# EAGLE board Qwiic_KX13X-Panel (EAGLE 9.6.2), part 1 of 5
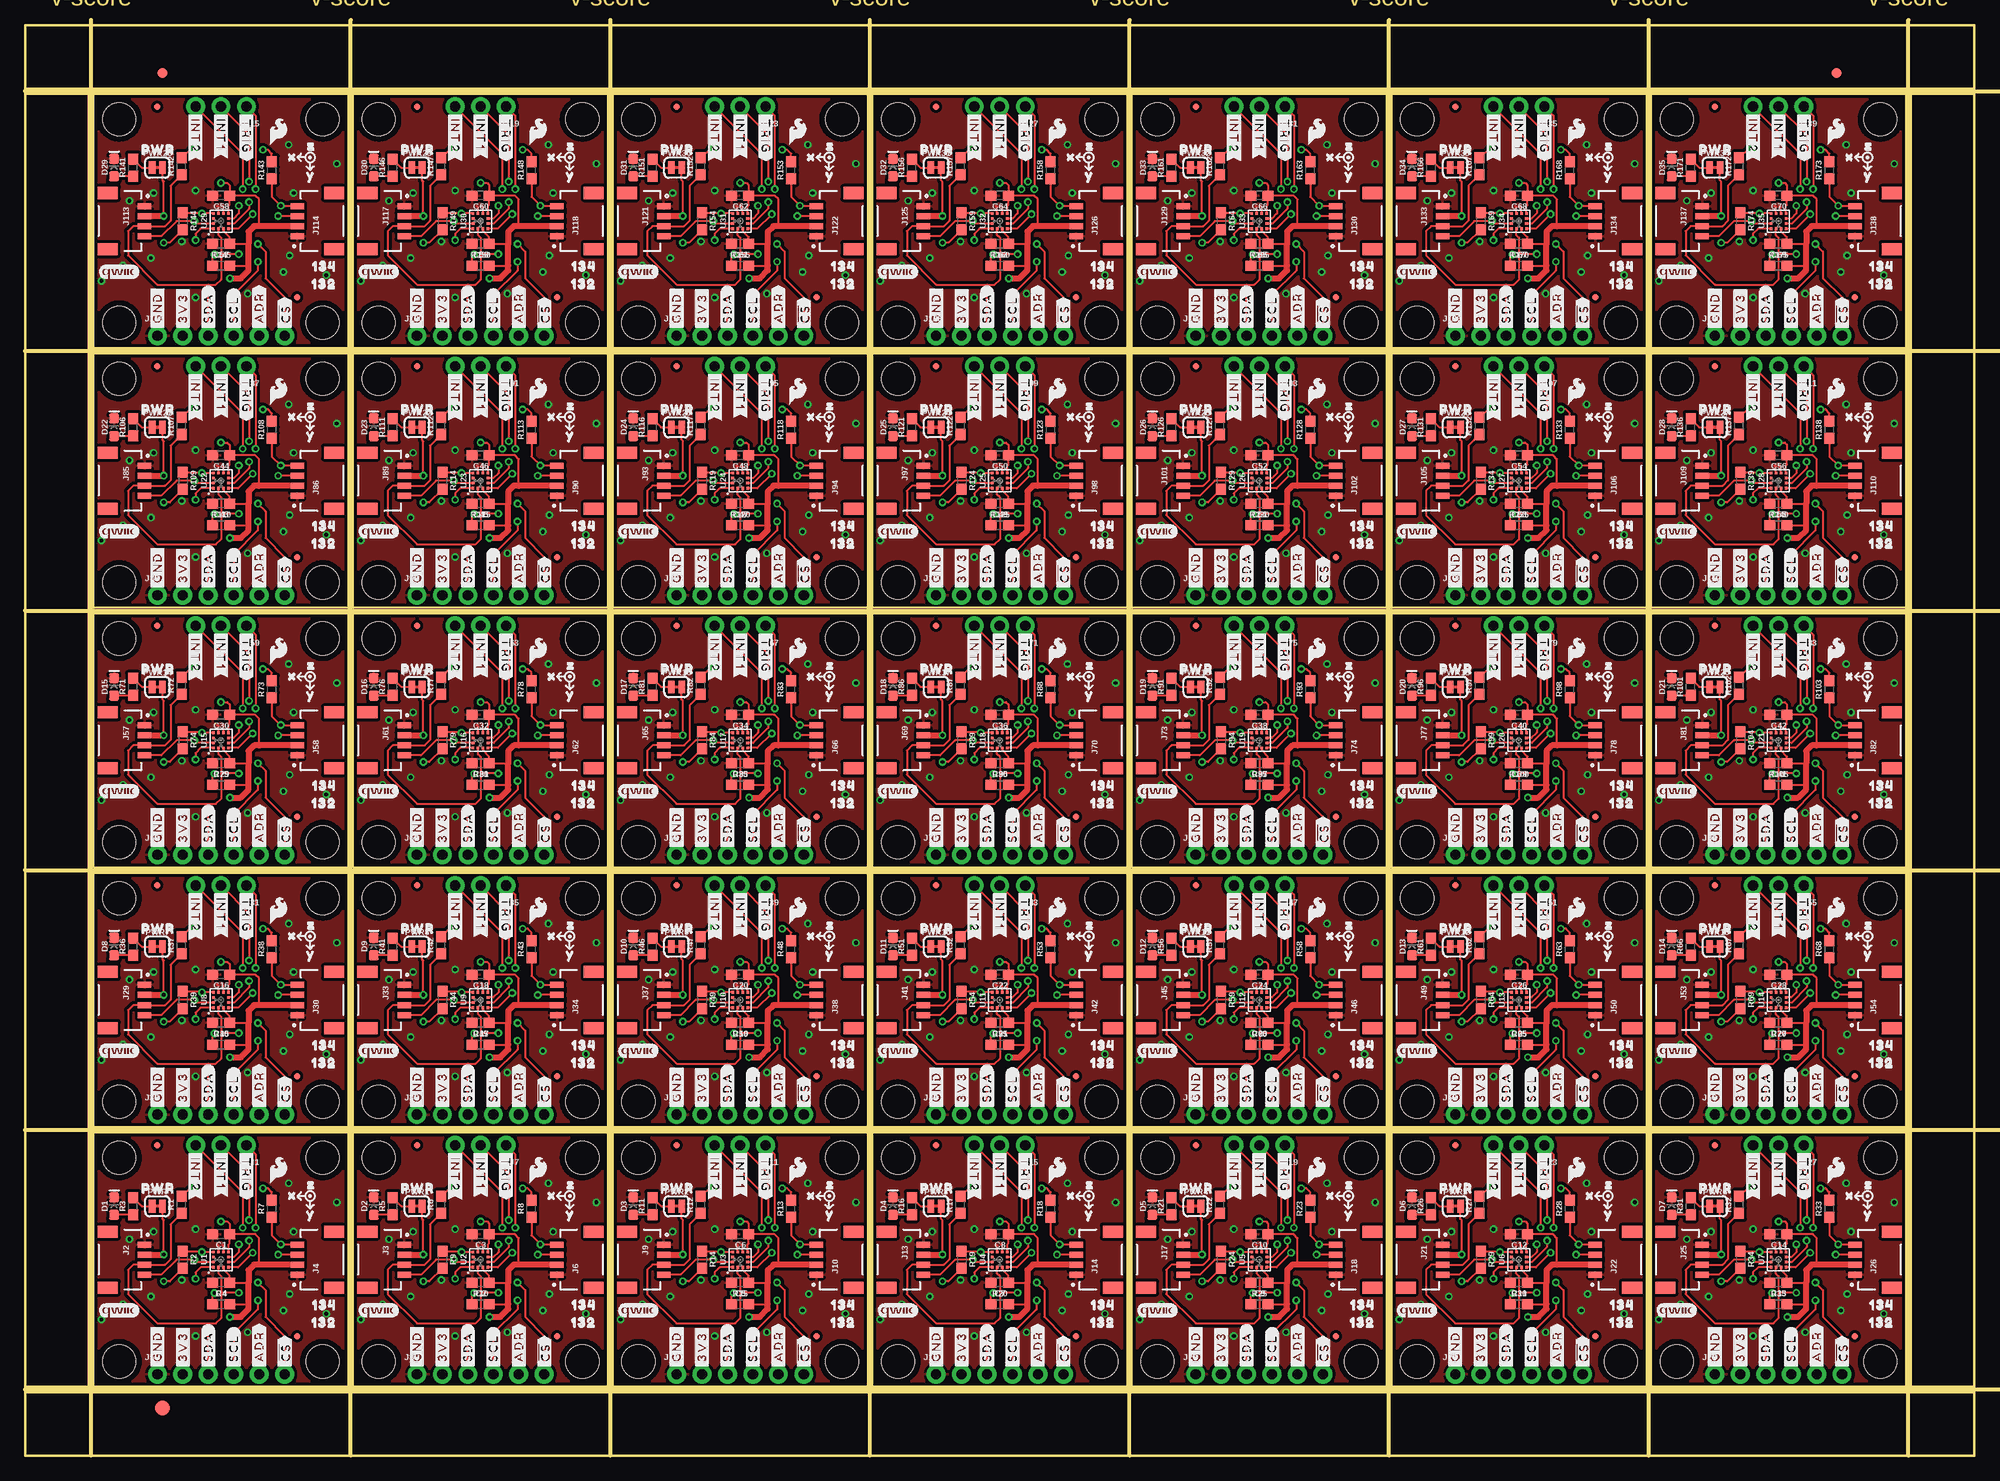
[diagram p0: board, top side]
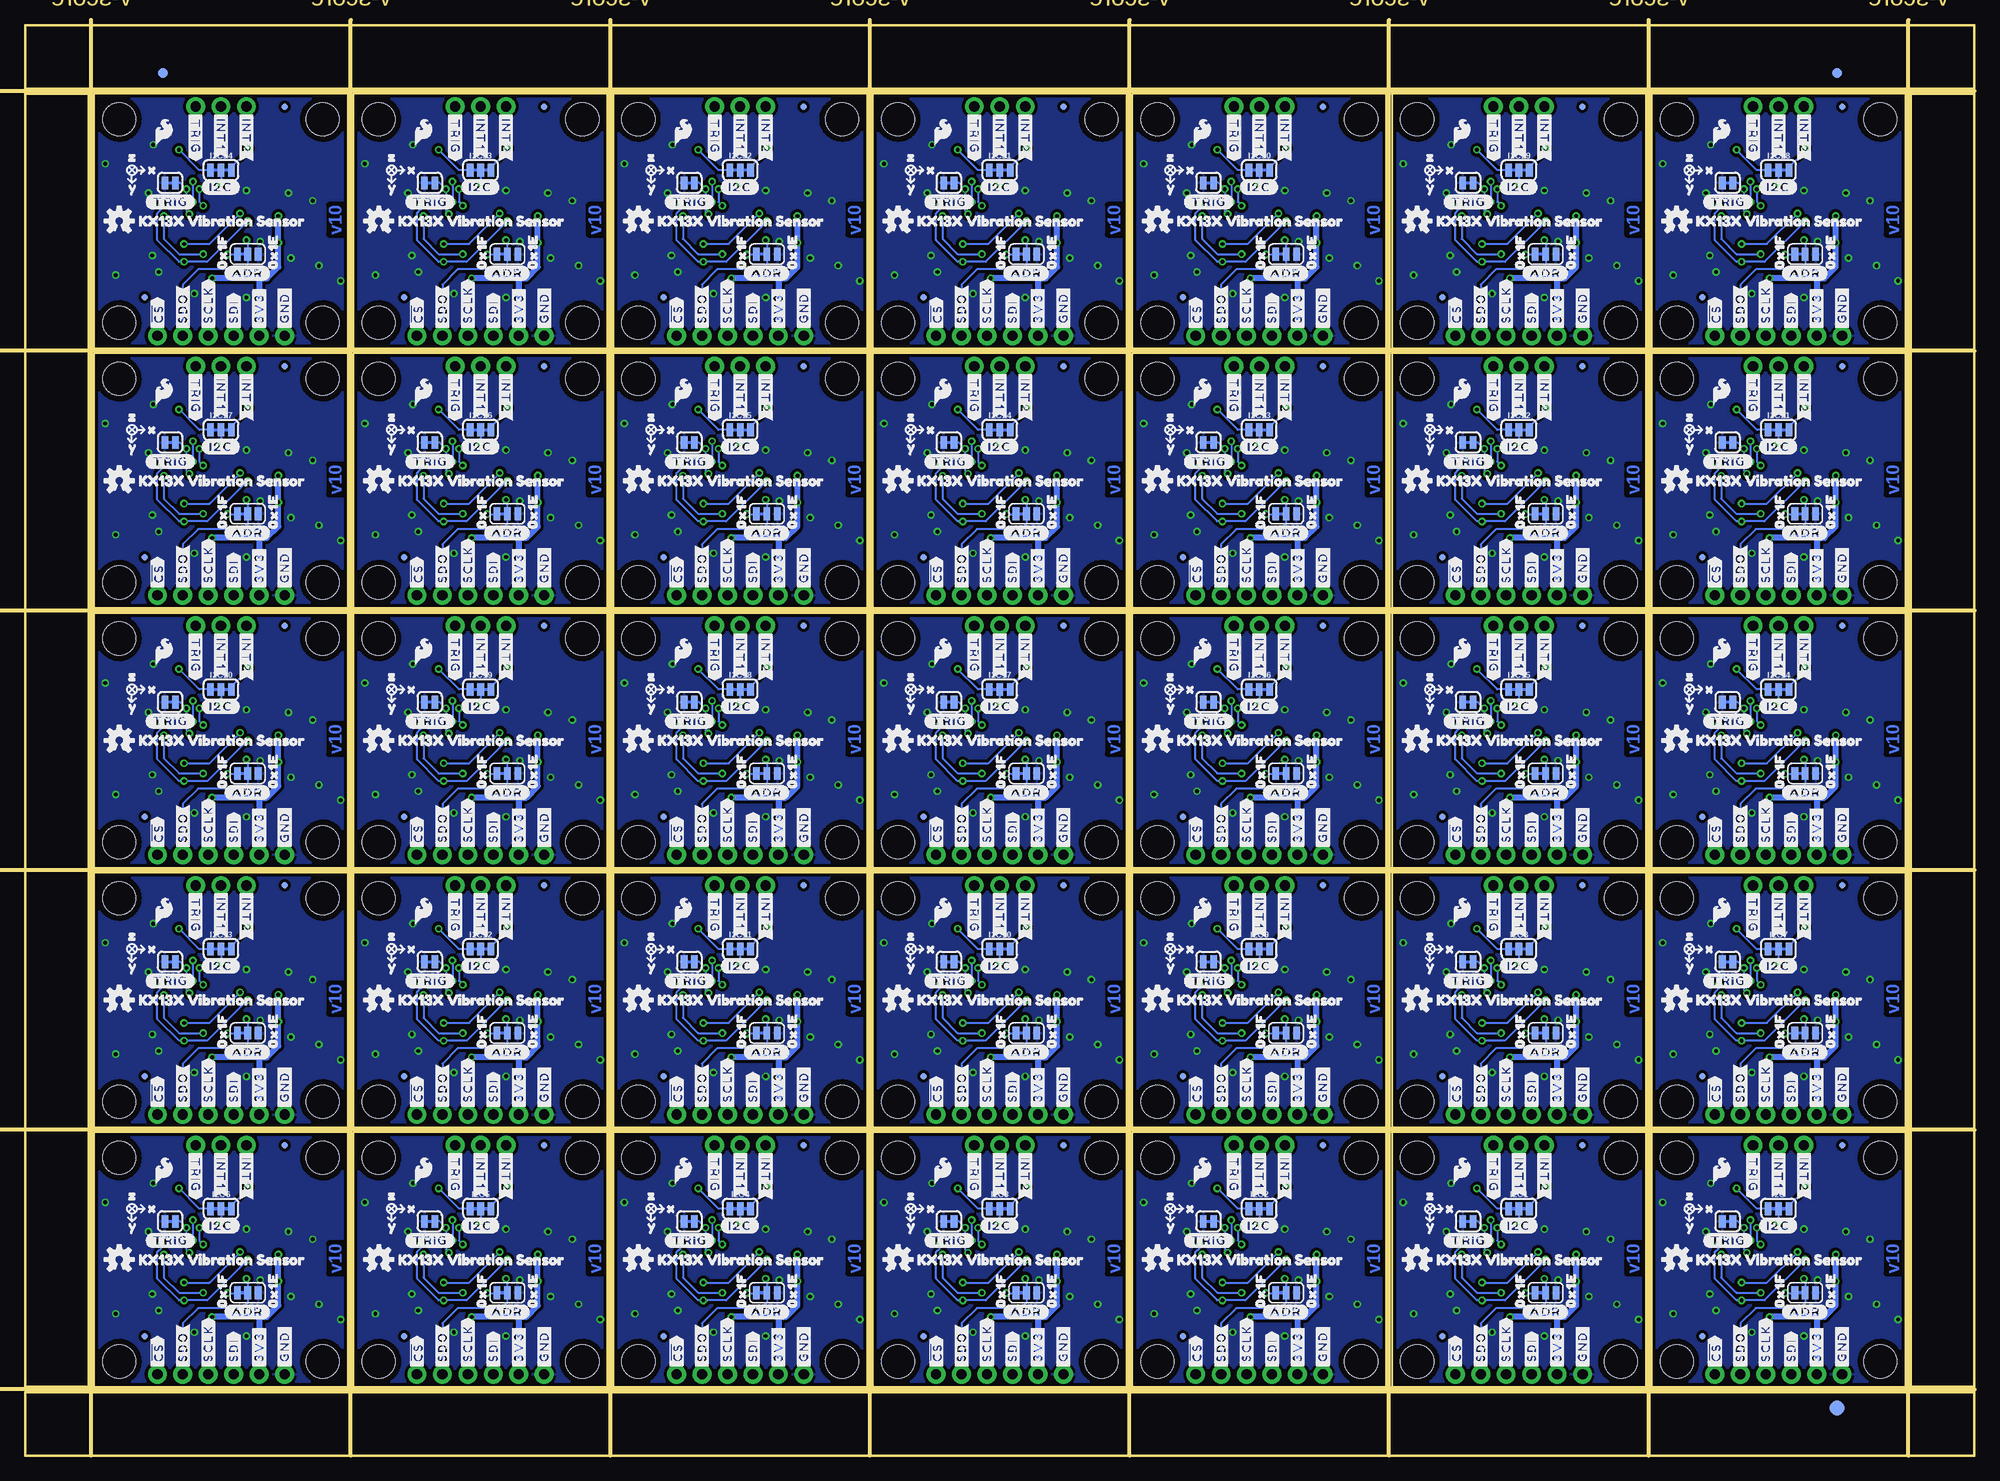
[diagram p1: board, bottom side, seen from below]

Size 194.56 x 142.75 mm. Coordinates in mm from the lower left corner, seen from the top.
Outline: 6.86,6.86 6.86,32.26 32.26,32.26 32.26,6.86 6.86,6.86
Outline: 32.77,6.86 32.77,32.26 58.17,32.26 58.17,6.86 32.77,6.86
Outline: 58.67,6.86 58.67,32.26 84.07,32.26 84.07,6.86 58.67,6.86
Outline: 84.58,6.86 84.58,32.26 109.98,32.26 109.98,6.86 84.58,6.86
Outline: 110.49,6.86 110.49,32.26 135.89,32.26 135.89,6.86 110.49,6.86
Outline: 136.4,6.86 136.4,32.26 161.8,32.26 161.8,6.86 136.4,6.86
Outline: 162.31,6.86 162.31,32.26 187.71,32.26 187.71,6.86 162.31,6.86
Outline: 6.86,32.77 6.86,58.17 32.26,58.17 32.26,32.77 6.86,32.77
Outline: 32.77,32.77 32.77,58.17 58.17,58.17 58.17,32.77 32.77,32.77
Outline: 58.67,32.77 58.67,58.17 84.07,58.17 84.07,32.77 58.67,32.77
Outline: 84.58,32.77 84.58,58.17 109.98,58.17 109.98,32.77 84.58,32.77
Outline: 110.49,32.77 110.49,58.17 135.89,58.17 135.89,32.77 110.49,32.77
Outline: 136.4,32.77 136.4,58.17 161.8,58.17 161.8,32.77 136.4,32.77
Outline: 162.31,32.77 162.31,58.17 187.71,58.17 187.71,32.77 162.31,32.77
Outline: 6.86,58.67 6.86,84.07 32.26,84.07 32.26,58.67 6.86,58.67
Outline: 32.77,58.67 32.77,84.07 58.17,84.07 58.17,58.67 32.77,58.67
Outline: 58.67,58.67 58.67,84.07 84.07,84.07 84.07,58.67 58.67,58.67
Outline: 84.58,58.67 84.58,84.07 109.98,84.07 109.98,58.67 84.58,58.67
Outline: 110.49,58.67 110.49,84.07 135.89,84.07 135.89,58.67 110.49,58.67
Outline: 136.4,58.67 136.4,84.07 161.8,84.07 161.8,58.67 136.4,58.67
Outline: 162.31,58.67 162.31,84.07 187.71,84.07 187.71,58.67 162.31,58.67
Outline: 6.86,84.58 6.86,109.98 32.26,109.98 32.26,84.58 6.86,84.58
Outline: 32.77,84.58 32.77,109.98 58.17,109.98 58.17,84.58 32.77,84.58
Outline: 58.67,84.58 58.67,109.98 84.07,109.98 84.07,84.58 58.67,84.58
Outline: 84.58,84.58 84.58,109.98 109.98,109.98 109.98,84.58 84.58,84.58
Outline: 110.49,84.58 110.49,109.98 135.89,109.98 135.89,84.58 110.49,84.58
Outline: 136.4,84.58 136.4,109.98 161.8,109.98 161.8,84.58 136.4,84.58
Outline: 162.31,84.58 162.31,109.98 187.71,109.98 187.71,84.58 162.31,84.58
Outline: 6.86,110.49 6.86,135.89 32.26,135.89 32.26,110.49 6.86,110.49
Outline: 32.77,110.49 32.77,135.89 58.17,135.89 58.17,110.49 32.77,110.49
Outline: 58.67,110.49 58.67,135.89 84.07,135.89 84.07,110.49 58.67,110.49
Outline: 84.58,110.49 84.58,135.89 109.98,135.89 109.98,110.49 84.58,110.49
Outline: 110.49,110.49 110.49,135.89 135.89,135.89 135.89,110.49 110.49,110.49
Outline: 136.4,110.49 136.4,135.89 161.8,135.89 161.8,110.49 136.4,110.49
Outline: 162.31,110.49 162.31,135.89 187.71,135.89 187.71,110.49 162.31,110.49
Outline: 0,6.35 194.56,6.35 194.56,0 0,0 0,6.35
Outline: 188.21,135.89 194.56,135.89 194.56,6.86 188.21,6.86 188.21,135.89
Outline: 0,142.75 194.56,142.75 194.56,136.4 0,136.4 0,142.75
Outline: 0,135.89 6.35,135.89 6.35,6.86 0,6.86 0,135.89
Copper layers (1*16): Top 0.035mm / dielectric 1.5mm / Bottom 0.035mm
Design rules "Qwiic_KX13X": minimum track width 7mil, minimum drill 15mil, track to track 7mil, track to pad 7mil, pad to pad 7mil, via to via 7mil, smd to smd 7mil, copper to edge 7mil, drill to drill 7mil, minimum pad ring 7mil, minimum via ring 7mil, stop-mask expansion 4mil, vias tented up to drill 25mil, thermal gap 10mil
Milling: 14 lines

## Footprints (pad centres in the part's own frame; a part is rotated, then mirrored left to right if it is on the bottom)
SMT-JUMPER_3_1-NC_TRACE_SILK = smd 0.66 x 1.27: 1 -1.041,0; 2 0,0; 3 1.041,0
0603 = smd 1.1 x 1: 1 -0.85,0; 2 0.85,0
LED-0603 = smd 1 x 1: A -0.877,0; C 0.877,0
FIDUCIAL-1X2 = smd 1 x 1: 1 0,0
FIDUCIAL-1.5X3 = smd 1.5 x 1.5: 1 0,0
SMT-JUMPER_3_2-NC_TRACE_SILK = smd 0.66 x 1.27: 1 -1.041,0; 2 0,0; 3 1.041,0
1X03_NO_SILK = drill 1.016 pad 1.88: 1 0,0; 2 2.54,0; 3 5.08,0
JST04_1MM_RA = smd 0.6 x 1.35: 1 -1.5,0; 2 -0.5,0; 3 0.5,0; 4 1.5,0 | smd 1.2 x 2: NC1 2.8,-3.675; NC2 -2.8,-3.675
1X06_NO_SILK = drill 1.016 pad 1.88: 1 0,0; 2 2.54,0; 3 5.08,0; 4 7.62,0; 5 10.16,0; 6 12.7,0
MICRO-FIDUCIAL = smd 0.635 x 0.635: 1 0,0
STAND-OFF = hole 3.302: 0,0
SMT-JUMPER_2_NC_TRACE_SILK = smd 0.66 x 1.27: 1 -0.521,0; 2 0.521,0
KX13X = smd 0.275 x 0.25: 1 -0.762,0.75; 2 -0.762,0.25; 3 -0.762,-0.25; 4 -0.762,-0.75; 7 0.762,-0.75; 8 0.762,-0.25; 9 0.762,0.25; 10 0.762,0.75 | smd 0.25 x 0.275: 5 -0.25,-0.75; 6 0.25,-0.75; 11 0.25,0.75; 12 -0.25,0.75

## Placement (x,y rotation side)
ADR  JUMPER-SMT_3_1-NC_TRACE_SILK  [SMT-JUMPER_3_1-NC_TRACE_SILK]  16.89,16.26 180 bottom
ADR1  JUMPER-SMT_3_1-NC_TRACE_SILK  [SMT-JUMPER_3_1-NC_TRACE_SILK]  42.8,16.26 180 bottom
ADR2  JUMPER-SMT_3_1-NC_TRACE_SILK  [SMT-JUMPER_3_1-NC_TRACE_SILK]  68.71,16.26 180 bottom
ADR3  JUMPER-SMT_3_1-NC_TRACE_SILK  [SMT-JUMPER_3_1-NC_TRACE_SILK]  94.62,16.26 180 bottom
ADR4  JUMPER-SMT_3_1-NC_TRACE_SILK  [SMT-JUMPER_3_1-NC_TRACE_SILK]  120.52,16.26 180 bottom
ADR5  JUMPER-SMT_3_1-NC_TRACE_SILK  [SMT-JUMPER_3_1-NC_TRACE_SILK]  146.43,16.26 180 bottom
ADR6  JUMPER-SMT_3_1-NC_TRACE_SILK  [SMT-JUMPER_3_1-NC_TRACE_SILK]  172.34,16.26 180 bottom
ADR7  JUMPER-SMT_3_1-NC_TRACE_SILK  [SMT-JUMPER_3_1-NC_TRACE_SILK]  16.89,42.16 180 bottom
ADR8  JUMPER-SMT_3_1-NC_TRACE_SILK  [SMT-JUMPER_3_1-NC_TRACE_SILK]  42.8,42.16 180 bottom
ADR9  JUMPER-SMT_3_1-NC_TRACE_SILK  [SMT-JUMPER_3_1-NC_TRACE_SILK]  68.71,42.16 180 bottom
ADR10  JUMPER-SMT_3_1-NC_TRACE_SILK  [SMT-JUMPER_3_1-NC_TRACE_SILK]  94.62,42.16 180 bottom
ADR11  JUMPER-SMT_3_1-NC_TRACE_SILK  [SMT-JUMPER_3_1-NC_TRACE_SILK]  120.52,42.16 180 bottom
ADR12  JUMPER-SMT_3_1-NC_TRACE_SILK  [SMT-JUMPER_3_1-NC_TRACE_SILK]  146.43,42.16 180 bottom
ADR13  JUMPER-SMT_3_1-NC_TRACE_SILK  [SMT-JUMPER_3_1-NC_TRACE_SILK]  172.34,42.16 180 bottom
ADR14  JUMPER-SMT_3_1-NC_TRACE_SILK  [SMT-JUMPER_3_1-NC_TRACE_SILK]  16.89,68.07 180 bottom
ADR15  JUMPER-SMT_3_1-NC_TRACE_SILK  [SMT-JUMPER_3_1-NC_TRACE_SILK]  42.8,68.07 180 bottom
ADR16  JUMPER-SMT_3_1-NC_TRACE_SILK  [SMT-JUMPER_3_1-NC_TRACE_SILK]  68.71,68.07 180 bottom
ADR17  JUMPER-SMT_3_1-NC_TRACE_SILK  [SMT-JUMPER_3_1-NC_TRACE_SILK]  94.62,68.07 180 bottom
ADR18  JUMPER-SMT_3_1-NC_TRACE_SILK  [SMT-JUMPER_3_1-NC_TRACE_SILK]  120.52,68.07 180 bottom
ADR19  JUMPER-SMT_3_1-NC_TRACE_SILK  [SMT-JUMPER_3_1-NC_TRACE_SILK]  146.43,68.07 180 bottom
ADR20  JUMPER-SMT_3_1-NC_TRACE_SILK  [SMT-JUMPER_3_1-NC_TRACE_SILK]  172.34,68.07 180 bottom
ADR21  JUMPER-SMT_3_1-NC_TRACE_SILK  [SMT-JUMPER_3_1-NC_TRACE_SILK]  16.89,93.98 180 bottom
ADR22  JUMPER-SMT_3_1-NC_TRACE_SILK  [SMT-JUMPER_3_1-NC_TRACE_SILK]  42.8,93.98 180 bottom
ADR23  JUMPER-SMT_3_1-NC_TRACE_SILK  [SMT-JUMPER_3_1-NC_TRACE_SILK]  68.71,93.98 180 bottom
ADR24  JUMPER-SMT_3_1-NC_TRACE_SILK  [SMT-JUMPER_3_1-NC_TRACE_SILK]  94.62,93.98 180 bottom
ADR25  JUMPER-SMT_3_1-NC_TRACE_SILK  [SMT-JUMPER_3_1-NC_TRACE_SILK]  120.52,93.98 180 bottom
ADR26  JUMPER-SMT_3_1-NC_TRACE_SILK  [SMT-JUMPER_3_1-NC_TRACE_SILK]  146.43,93.98 180 bottom
ADR27  JUMPER-SMT_3_1-NC_TRACE_SILK  [SMT-JUMPER_3_1-NC_TRACE_SILK]  172.34,93.98 180 bottom
ADR28  JUMPER-SMT_3_1-NC_TRACE_SILK  [SMT-JUMPER_3_1-NC_TRACE_SILK]  16.89,119.89 180 bottom
ADR29  JUMPER-SMT_3_1-NC_TRACE_SILK  [SMT-JUMPER_3_1-NC_TRACE_SILK]  42.8,119.89 180 bottom
ADR30  JUMPER-SMT_3_1-NC_TRACE_SILK  [SMT-JUMPER_3_1-NC_TRACE_SILK]  68.71,119.89 180 bottom
ADR31  JUMPER-SMT_3_1-NC_TRACE_SILK  [SMT-JUMPER_3_1-NC_TRACE_SILK]  94.62,119.89 180 bottom
ADR32  JUMPER-SMT_3_1-NC_TRACE_SILK  [SMT-JUMPER_3_1-NC_TRACE_SILK]  120.52,119.89 180 bottom
ADR33  JUMPER-SMT_3_1-NC_TRACE_SILK  [SMT-JUMPER_3_1-NC_TRACE_SILK]  146.43,119.89 180 bottom
ADR34  JUMPER-SMT_3_1-NC_TRACE_SILK  [SMT-JUMPER_3_1-NC_TRACE_SILK]  172.34,119.89 180 bottom
C1  0.1uF  [0603]  19.56,22.1 180 top
C2  0.1uF  [0603]  45.47,17.27 180 top
C3  0.1uF  [0603]  45.47,22.1 180 top
C4  0.1uF  [0603]  19.56,17.27 180 top
C5  0.1uF  [0603]  71.37,17.27 180 top
C6  0.1uF  [0603]  71.37,22.1 180 top
C7  0.1uF  [0603]  97.28,17.27 180 top
C8  0.1uF  [0603]  97.28,22.1 180 top
C9  0.1uF  [0603]  123.19,17.27 180 top
C10  0.1uF  [0603]  123.19,22.1 180 top
C11  0.1uF  [0603]  149.1,17.27 180 top
C12  0.1uF  [0603]  149.1,22.1 180 top
C13  0.1uF  [0603]  175.01,17.27 180 top
C14  0.1uF  [0603]  175.01,22.1 180 top
C15  0.1uF  [0603]  19.56,43.18 180 top
C16  0.1uF  [0603]  19.56,48.01 180 top
C17  0.1uF  [0603]  45.47,43.18 180 top
C18  0.1uF  [0603]  45.47,48.01 180 top
C19  0.1uF  [0603]  71.37,43.18 180 top
C20  0.1uF  [0603]  71.37,48.01 180 top
C21  0.1uF  [0603]  97.28,43.18 180 top
C22  0.1uF  [0603]  97.28,48.01 180 top
C23  0.1uF  [0603]  123.19,43.18 180 top
C24  0.1uF  [0603]  123.19,48.01 180 top
C25  0.1uF  [0603]  149.1,43.18 180 top
C26  0.1uF  [0603]  149.1,48.01 180 top
C27  0.1uF  [0603]  175.01,43.18 180 top
C28  0.1uF  [0603]  175.01,48.01 180 top
C29  0.1uF  [0603]  19.56,69.09 180 top
C30  0.1uF  [0603]  19.56,73.91 180 top
C31  0.1uF  [0603]  45.47,69.09 180 top
C32  0.1uF  [0603]  45.47,73.91 180 top
C33  0.1uF  [0603]  71.37,69.09 180 top
C34  0.1uF  [0603]  71.37,73.91 180 top
C35  0.1uF  [0603]  97.28,69.09 180 top
C36  0.1uF  [0603]  97.28,73.91 180 top
C37  0.1uF  [0603]  123.19,69.09 180 top
C38  0.1uF  [0603]  123.19,73.91 180 top
C39  0.1uF  [0603]  149.1,69.09 180 top
C40  0.1uF  [0603]  149.1,73.91 180 top
C41  0.1uF  [0603]  175.01,69.09 180 top
C42  0.1uF  [0603]  175.01,73.91 180 top
C43  0.1uF  [0603]  19.56,95 180 top
C44  0.1uF  [0603]  19.56,99.82 180 top
C45  0.1uF  [0603]  45.47,95 180 top
C46  0.1uF  [0603]  45.47,99.82 180 top
C47  0.1uF  [0603]  71.37,95 180 top
C48  0.1uF  [0603]  71.37,99.82 180 top
C49  0.1uF  [0603]  97.28,95 180 top
C50  0.1uF  [0603]  97.28,99.82 180 top
C51  0.1uF  [0603]  123.19,95 180 top
C52  0.1uF  [0603]  123.19,99.82 180 top
C53  0.1uF  [0603]  149.1,95 180 top
C54  0.1uF  [0603]  149.1,99.82 180 top
C55  0.1uF  [0603]  175.01,95 180 top
C56  0.1uF  [0603]  175.01,99.82 180 top
C57  0.1uF  [0603]  19.56,120.9 180 top
C58  0.1uF  [0603]  19.56,125.73 180 top
C59  0.1uF  [0603]  45.47,120.9 180 top
C60  0.1uF  [0603]  45.47,125.73 180 top
C61  0.1uF  [0603]  71.37,120.9 180 top
C62  0.1uF  [0603]  71.37,125.73 180 top
C63  0.1uF  [0603]  97.28,120.9 180 top
C64  0.1uF  [0603]  97.28,125.73 180 top
C65  0.1uF  [0603]  123.19,120.9 180 top
C66  0.1uF  [0603]  123.19,125.73 180 top
C67  0.1uF  [0603]  149.1,120.9 180 top
C68  0.1uF  [0603]  149.1,125.73 180 top
C69  0.1uF  [0603]  175.01,120.9 180 top
C70  0.1uF  [0603]  175.01,125.73 180 top
D1  RED  [LED-0603]  8.89,24.89 90 top
D2  RED  [LED-0603]  34.8,24.89 90 top
D3  RED  [LED-0603]  60.71,24.89 90 top
D4  RED  [LED-0603]  86.61,24.89 90 top
D5  RED  [LED-0603]  112.52,24.89 90 top
D6  RED  [LED-0603]  138.43,24.89 90 top
D7  RED  [LED-0603]  164.34,24.89 90 top
D8  RED  [LED-0603]  8.89,50.8 90 top
D9  RED  [LED-0603]  34.8,50.8 90 top
D10  RED  [LED-0603]  60.71,50.8 90 top
D11  RED  [LED-0603]  86.61,50.8 90 top
D12  RED  [LED-0603]  112.52,50.8 90 top
D13  RED  [LED-0603]  138.43,50.8 90 top
D14  RED  [LED-0603]  164.34,50.8 90 top
D15  RED  [LED-0603]  8.89,76.71 90 top
D16  RED  [LED-0603]  34.8,76.71 90 top
D17  RED  [LED-0603]  60.71,76.71 90 top
D18  RED  [LED-0603]  86.61,76.71 90 top
D19  RED  [LED-0603]  112.52,76.71 90 top
D20  RED  [LED-0603]  138.43,76.71 90 top
D21  RED  [LED-0603]  164.34,76.71 90 top
D22  RED  [LED-0603]  8.89,102.62 90 top
D23  RED  [LED-0603]  34.8,102.62 90 top
D24  RED  [LED-0603]  60.71,102.62 90 top
D25  RED  [LED-0603]  86.61,102.62 90 top
D26  RED  [LED-0603]  112.52,102.62 90 top
D27  RED  [LED-0603]  138.43,102.62 90 top
D28  RED  [LED-0603]  164.34,102.62 90 top
D29  RED  [LED-0603]  8.89,128.52 90 top
D30  RED  [LED-0603]  34.8,128.52 90 top
D31  RED  [LED-0603]  60.71,128.52 90 top
D32  RED  [LED-0603]  86.61,128.52 90 top
D33  RED  [LED-0603]  112.52,128.52 90 top
D34  RED  [LED-0603]  138.43,128.52 90 top
D35  RED  [LED-0603]  164.34,128.52 90 top
E$1  [FIDUCIAL-1X2]  13.72,137.99 0 top
E$2  [FIDUCIAL-1X2]  13.72,137.99 0 bottom
E$3  [FIDUCIAL-1X2]  180.78,137.99 0 top
E$4  [FIDUCIAL-1X2]  180.78,137.99 0 bottom
E$5  [FIDUCIAL-1.5X3]  13.72,4.76 0 top
E$6  [FIDUCIAL-1.5X3]  13.72,4.76 0 bottom
I2C  JUMPER-SMT_3_2-NC_TRACE_SILK  [SMT-JUMPER_3_2-NC_TRACE_SILK]  19.56,24.64 0 bottom
I2C1  JUMPER-SMT_3_2-NC_TRACE_SILK  [SMT-JUMPER_3_2-NC_TRACE_SILK]  45.47,24.64 0 bottom
I2C2  JUMPER-SMT_3_2-NC_TRACE_SILK  [SMT-JUMPER_3_2-NC_TRACE_SILK]  71.37,24.64 0 bottom
I2C3  JUMPER-SMT_3_2-NC_TRACE_SILK  [SMT-JUMPER_3_2-NC_TRACE_SILK]  97.28,24.64 0 bottom
I2C4  JUMPER-SMT_3_2-NC_TRACE_SILK  [SMT-JUMPER_3_2-NC_TRACE_SILK]  123.19,24.64 0 bottom
I2C5  JUMPER-SMT_3_2-NC_TRACE_SILK  [SMT-JUMPER_3_2-NC_TRACE_SILK]  149.1,24.64 0 bottom
I2C6  JUMPER-SMT_3_2-NC_TRACE_SILK  [SMT-JUMPER_3_2-NC_TRACE_SILK]  175.01,24.64 0 bottom
I2C7  JUMPER-SMT_3_2-NC_TRACE_SILK  [SMT-JUMPER_3_2-NC_TRACE_SILK]  19.56,50.55 0 bottom
I2C8  JUMPER-SMT_3_2-NC_TRACE_SILK  [SMT-JUMPER_3_2-NC_TRACE_SILK]  45.47,50.55 0 bottom
I2C9  JUMPER-SMT_3_2-NC_TRACE_SILK  [SMT-JUMPER_3_2-NC_TRACE_SILK]  71.37,50.55 0 bottom
I2C10  JUMPER-SMT_3_2-NC_TRACE_SILK  [SMT-JUMPER_3_2-NC_TRACE_SILK]  97.28,50.55 0 bottom
I2C11  JUMPER-SMT_3_2-NC_TRACE_SILK  [SMT-JUMPER_3_2-NC_TRACE_SILK]  123.19,50.55 0 bottom
I2C12  JUMPER-SMT_3_2-NC_TRACE_SILK  [SMT-JUMPER_3_2-NC_TRACE_SILK]  149.1,50.55 0 bottom
I2C13  JUMPER-SMT_3_2-NC_TRACE_SILK  [SMT-JUMPER_3_2-NC_TRACE_SILK]  175.01,50.55 0 bottom
I2C14  JUMPER-SMT_3_2-NC_TRACE_SILK  [SMT-JUMPER_3_2-NC_TRACE_SILK]  19.56,76.45 0 bottom
I2C15  JUMPER-SMT_3_2-NC_TRACE_SILK  [SMT-JUMPER_3_2-NC_TRACE_SILK]  45.47,76.45 0 bottom
I2C16  JUMPER-SMT_3_2-NC_TRACE_SILK  [SMT-JUMPER_3_2-NC_TRACE_SILK]  71.37,76.45 0 bottom
I2C17  JUMPER-SMT_3_2-NC_TRACE_SILK  [SMT-JUMPER_3_2-NC_TRACE_SILK]  97.28,76.45 0 bottom
I2C18  JUMPER-SMT_3_2-NC_TRACE_SILK  [SMT-JUMPER_3_2-NC_TRACE_SILK]  123.19,76.45 0 bottom
I2C19  JUMPER-SMT_3_2-NC_TRACE_SILK  [SMT-JUMPER_3_2-NC_TRACE_SILK]  149.1,76.45 0 bottom
I2C20  JUMPER-SMT_3_2-NC_TRACE_SILK  [SMT-JUMPER_3_2-NC_TRACE_SILK]  175.01,76.45 0 bottom
I2C21  JUMPER-SMT_3_2-NC_TRACE_SILK  [SMT-JUMPER_3_2-NC_TRACE_SILK]  19.56,102.36 0 bottom
I2C22  JUMPER-SMT_3_2-NC_TRACE_SILK  [SMT-JUMPER_3_2-NC_TRACE_SILK]  45.47,102.36 0 bottom
I2C23  JUMPER-SMT_3_2-NC_TRACE_SILK  [SMT-JUMPER_3_2-NC_TRACE_SILK]  71.37,102.36 0 bottom
I2C24  JUMPER-SMT_3_2-NC_TRACE_SILK  [SMT-JUMPER_3_2-NC_TRACE_SILK]  97.28,102.36 0 bottom
I2C25  JUMPER-SMT_3_2-NC_TRACE_SILK  [SMT-JUMPER_3_2-NC_TRACE_SILK]  123.19,102.36 0 bottom
I2C26  JUMPER-SMT_3_2-NC_TRACE_SILK  [SMT-JUMPER_3_2-NC_TRACE_SILK]  149.1,102.36 0 bottom
I2C27  JUMPER-SMT_3_2-NC_TRACE_SILK  [SMT-JUMPER_3_2-NC_TRACE_SILK]  175.01,102.36 0 bottom
I2C28  JUMPER-SMT_3_2-NC_TRACE_SILK  [SMT-JUMPER_3_2-NC_TRACE_SILK]  19.56,128.27 0 bottom
I2C29  JUMPER-SMT_3_2-NC_TRACE_SILK  [SMT-JUMPER_3_2-NC_TRACE_SILK]  45.47,128.27 0 bottom
I2C30  JUMPER-SMT_3_2-NC_TRACE_SILK  [SMT-JUMPER_3_2-NC_TRACE_SILK]  71.37,128.27 0 bottom
I2C31  JUMPER-SMT_3_2-NC_TRACE_SILK  [SMT-JUMPER_3_2-NC_TRACE_SILK]  97.28,128.27 0 bottom
I2C32  JUMPER-SMT_3_2-NC_TRACE_SILK  [SMT-JUMPER_3_2-NC_TRACE_SILK]  123.19,128.27 0 bottom
I2C33  JUMPER-SMT_3_2-NC_TRACE_SILK  [SMT-JUMPER_3_2-NC_TRACE_SILK]  149.1,128.27 0 bottom
I2C34  JUMPER-SMT_3_2-NC_TRACE_SILK  [SMT-JUMPER_3_2-NC_TRACE_SILK]  175.01,128.27 0 bottom
J1  [1X03_NO_SILK]  22.1,30.99 180 top
J2  QWIIC  [JST04_1MM_RA]  11.94,19.56 270 top
J3  QWIIC  [JST04_1MM_RA]  37.85,19.56 270 top
J4  QWIIC  [JST04_1MM_RA]  27.18,19.56 90 top
J5  [1X06_NO_SILK]  13.21,8.13 0 top
J6  QWIIC  [JST04_1MM_RA]  53.09,19.56 90 top
J7  [1X03_NO_SILK]  48.01,30.99 180 top
J8  [1X06_NO_SILK]  39.12,8.13 0 top
J9  QWIIC  [JST04_1MM_RA]  63.75,19.56 270 top
J10  QWIIC  [JST04_1MM_RA]  78.99,19.56 90 top
J11  [1X03_NO_SILK]  73.91,30.99 180 top
J12  [1X06_NO_SILK]  65.02,8.13 0 top
J13  QWIIC  [JST04_1MM_RA]  89.66,19.56 270 top
J14  QWIIC  [JST04_1MM_RA]  104.9,19.56 90 top
J15  [1X03_NO_SILK]  99.82,30.99 180 top
J16  [1X06_NO_SILK]  90.93,8.13 0 top
J17  QWIIC  [JST04_1MM_RA]  115.57,19.56 270 top
J18  QWIIC  [JST04_1MM_RA]  130.81,19.56 90 top
J19  [1X03_NO_SILK]  125.73,30.99 180 top
J20  [1X06_NO_SILK]  116.84,8.13 0 top
J21  QWIIC  [JST04_1MM_RA]  141.48,19.56 270 top
J22  QWIIC  [JST04_1MM_RA]  156.72,19.56 90 top
J23  [1X03_NO_SILK]  151.64,30.99 180 top
J24  [1X06_NO_SILK]  142.75,8.13 0 top
J25  QWIIC  [JST04_1MM_RA]  167.39,19.56 270 top
J26  QWIIC  [JST04_1MM_RA]  182.63,19.56 90 top
J27  [1X03_NO_SILK]  177.55,30.99 180 top
J28  [1X06_NO_SILK]  168.66,8.13 0 top
J29  QWIIC  [JST04_1MM_RA]  11.94,45.47 270 top
J30  QWIIC  [JST04_1MM_RA]  27.18,45.47 90 top
J31  [1X03_NO_SILK]  22.1,56.9 180 top
J32  [1X06_NO_SILK]  13.21,34.04 0 top
J33  QWIIC  [JST04_1MM_RA]  37.85,45.47 270 top
J34  QWIIC  [JST04_1MM_RA]  53.09,45.47 90 top
J35  [1X03_NO_SILK]  48.01,56.9 180 top
J36  [1X06_NO_SILK]  39.12,34.04 0 top
J37  QWIIC  [JST04_1MM_RA]  63.75,45.47 270 top
J38  QWIIC  [JST04_1MM_RA]  78.99,45.47 90 top
J39  [1X03_NO_SILK]  73.91,56.9 180 top
J40  [1X06_NO_SILK]  65.02,34.04 0 top
J41  QWIIC  [JST04_1MM_RA]  89.66,45.47 270 top
J42  QWIIC  [JST04_1MM_RA]  104.9,45.47 90 top
J43  [1X03_NO_SILK]  99.82,56.9 180 top
J44  [1X06_NO_SILK]  90.93,34.04 0 top
J45  QWIIC  [JST04_1MM_RA]  115.57,45.47 270 top
J46  QWIIC  [JST04_1MM_RA]  130.81,45.47 90 top
J47  [1X03_NO_SILK]  125.73,56.9 180 top
J48  [1X06_NO_SILK]  116.84,34.04 0 top
J49  QWIIC  [JST04_1MM_RA]  141.48,45.47 270 top
J50  QWIIC  [JST04_1MM_RA]  156.72,45.47 90 top
J51  [1X03_NO_SILK]  151.64,56.9 180 top
J52  [1X06_NO_SILK]  142.75,34.04 0 top
J53  QWIIC  [JST04_1MM_RA]  167.39,45.47 270 top
J54  QWIIC  [JST04_1MM_RA]  182.63,45.47 90 top
J55  [1X03_NO_SILK]  177.55,56.9 180 top
J56  [1X06_NO_SILK]  168.66,34.04 0 top
J57  QWIIC  [JST04_1MM_RA]  11.94,71.37 270 top
J58  QWIIC  [JST04_1MM_RA]  27.18,71.37 90 top
J59  [1X03_NO_SILK]  22.1,82.8 180 top
J60  [1X06_NO_SILK]  13.21,59.94 0 top
J61  QWIIC  [JST04_1MM_RA]  37.85,71.37 270 top
J62  QWIIC  [JST04_1MM_RA]  53.09,71.37 90 top
J63  [1X03_NO_SILK]  48.01,82.8 180 top
J64  [1X06_NO_SILK]  39.12,59.94 0 top
J65  QWIIC  [JST04_1MM_RA]  63.75,71.37 270 top
J66  QWIIC  [JST04_1MM_RA]  78.99,71.37 90 top
J67  [1X03_NO_SILK]  73.91,82.8 180 top
J68  [1X06_NO_SILK]  65.02,59.94 0 top
J69  QWIIC  [JST04_1MM_RA]  89.66,71.37 270 top
J70  QWIIC  [JST04_1MM_RA]  104.9,71.37 90 top
J71  [1X03_NO_SILK]  99.82,82.8 180 top
J72  [1X06_NO_SILK]  90.93,59.94 0 top
J73  QWIIC  [JST04_1MM_RA]  115.57,71.37 270 top
J74  QWIIC  [JST04_1MM_RA]  130.81,71.37 90 top
J75  [1X03_NO_SILK]  125.73,82.8 180 top
J76  [1X06_NO_SILK]  116.84,59.94 0 top
J77  QWIIC  [JST04_1MM_RA]  141.48,71.37 270 top
J78  QWIIC  [JST04_1MM_RA]  156.72,71.37 90 top
J79  [1X03_NO_SILK]  151.64,82.8 180 top
J80  [1X06_NO_SILK]  142.75,59.94 0 top
J81  QWIIC  [JST04_1MM_RA]  167.39,71.37 270 top
J82  QWIIC  [JST04_1MM_RA]  182.63,71.37 90 top
J83  [1X03_NO_SILK]  177.55,82.8 180 top
J84  [1X06_NO_SILK]  168.66,59.94 0 top
J85  QWIIC  [JST04_1MM_RA]  11.94,97.28 270 top
J86  QWIIC  [JST04_1MM_RA]  27.18,97.28 90 top
J87  [1X03_NO_SILK]  22.1,108.71 180 top
J88  [1X06_NO_SILK]  13.21,85.85 0 top
J89  QWIIC  [JST04_1MM_RA]  37.85,97.28 270 top
J90  QWIIC  [JST04_1MM_RA]  53.09,97.28 90 top
J91  [1X03_NO_SILK]  48.01,108.71 180 top
J92  [1X06_NO_SILK]  39.12,85.85 0 top
J93  QWIIC  [JST04_1MM_RA]  63.75,97.28 270 top
J94  QWIIC  [JST04_1MM_RA]  78.99,97.28 90 top
J95  [1X03_NO_SILK]  73.91,108.71 180 top
J96  [1X06_NO_SILK]  65.02,85.85 0 top
J97  QWIIC  [JST04_1MM_RA]  89.66,97.28 270 top
J98  QWIIC  [JST04_1MM_RA]  104.9,97.28 90 top
J99  [1X03_NO_SILK]  99.82,108.71 180 top
J100  [1X06_NO_SILK]  90.93,85.85 0 top
J101  QWIIC  [JST04_1MM_RA]  115.57,97.28 270 top
J102  QWIIC  [JST04_1MM_RA]  130.81,97.28 90 top
J103  [1X03_NO_SILK]  125.73,108.71 180 top
J104  [1X06_NO_SILK]  116.84,85.85 0 top
J105  QWIIC  [JST04_1MM_RA]  141.48,97.28 270 top
J106  QWIIC  [JST04_1MM_RA]  156.72,97.28 90 top
J107  [1X03_NO_SILK]  151.64,108.71 180 top
J108  [1X06_NO_SILK]  142.75,85.85 0 top
J109  QWIIC  [JST04_1MM_RA]  167.39,97.28 270 top
J110  QWIIC  [JST04_1MM_RA]  182.63,97.28 90 top
J111  [1X03_NO_SILK]  177.55,108.71 180 top
J112  [1X06_NO_SILK]  168.66,85.85 0 top
J113  QWIIC  [JST04_1MM_RA]  11.94,123.19 270 top
J114  QWIIC  [JST04_1MM_RA]  27.18,123.19 90 top
J115  [1X03_NO_SILK]  22.1,134.62 180 top
J116  [1X06_NO_SILK]  13.21,111.76 0 top
J117  QWIIC  [JST04_1MM_RA]  37.85,123.19 270 top
J118  QWIIC  [JST04_1MM_RA]  53.09,123.19 90 top
J119  [1X03_NO_SILK]  48.01,134.62 180 top
J120  [1X06_NO_SILK]  39.12,111.76 0 top
J121  QWIIC  [JST04_1MM_RA]  63.75,123.19 270 top
J122  QWIIC  [JST04_1MM_RA]  78.99,123.19 90 top
J123  [1X03_NO_SILK]  73.91,134.62 180 top
J124  [1X06_NO_SILK]  65.02,111.76 0 top
J125  QWIIC  [JST04_1MM_RA]  89.66,123.19 270 top
J126  QWIIC  [JST04_1MM_RA]  104.9,123.19 90 top
J127  [1X03_NO_SILK]  99.82,134.62 180 top
J128  [1X06_NO_SILK]  90.93,111.76 0 top
J129  QWIIC  [JST04_1MM_RA]  115.57,123.19 270 top
J130  QWIIC  [JST04_1MM_RA]  130.81,123.19 90 top
J131  [1X03_NO_SILK]  125.73,134.62 180 top
J132  [1X06_NO_SILK]  116.84,111.76 0 top
J133  QWIIC  [JST04_1MM_RA]  141.48,123.19 270 top
J134  QWIIC  [JST04_1MM_RA]  156.72,123.19 90 top
J135  [1X03_NO_SILK]  151.64,134.62 180 top
J136  [1X06_NO_SILK]  142.75,111.76 0 top
J137  QWIIC  [JST04_1MM_RA]  167.39,123.19 270 top
J138  QWIIC  [JST04_1MM_RA]  182.63,123.19 90 top
J139  [1X03_NO_SILK]  177.55,134.62 180 top
J140  [1X06_NO_SILK]  168.66,111.76 0 top
JP1  FIDUCIALUFIDUCIAL  [MICRO-FIDUCIAL]  13.21,30.99 0 bottom
JP2  FIDUCIALUFIDUCIAL  [MICRO-FIDUCIAL]  27.18,11.94 0 top
JP3  STAND-OFF  [STAND-OFF]  9.4,29.72 0 top
JP4  STAND-OFF  [STAND-OFF]  29.72,29.72 0 top
JP5  FIDUCIALUFIDUCIAL  [MICRO-FIDUCIAL]  27.18,11.94 0 bottom
JP6  FIDUCIALUFIDUCIAL  [MICRO-FIDUCIAL]  13.21,30.99 0 top
JP7  STAND-OFF  [STAND-OFF]  9.4,9.4 0 top
JP8  STAND-OFF  [STAND-OFF]  29.72,9.4 0 top
JP9  STAND-OFF  [STAND-OFF]  35.31,29.72 0 top
JP10  STAND-OFF  [STAND-OFF]  55.63,29.72 0 top
JP11  FIDUCIALUFIDUCIAL  [MICRO-FIDUCIAL]  53.09,11.94 0 top
JP12  FIDUCIALUFIDUCIAL  [MICRO-FIDUCIAL]  39.12,30.99 0 top
JP13  FIDUCIALUFIDUCIAL  [MICRO-FIDUCIAL]  39.12,30.99 0 bottom
JP14  FIDUCIALUFIDUCIAL  [MICRO-FIDUCIAL]  53.09,11.94 0 bottom
JP15  STAND-OFF  [STAND-OFF]  35.31,9.4 0 top
JP16  STAND-OFF  [STAND-OFF]  55.63,9.4 0 top
JP17  STAND-OFF  [STAND-OFF]  61.21,29.72 0 top
JP18  STAND-OFF  [STAND-OFF]  81.53,29.72 0 top
JP19  FIDUCIALUFIDUCIAL  [MICRO-FIDUCIAL]  78.99,11.94 0 top
JP20  FIDUCIALUFIDUCIAL  [MICRO-FIDUCIAL]  65.02,30.99 0 top
JP21  FIDUCIALUFIDUCIAL  [MICRO-FIDUCIAL]  65.02,30.99 0 bottom
JP22  FIDUCIALUFIDUCIAL  [MICRO-FIDUCIAL]  78.99,11.94 0 bottom
JP23  STAND-OFF  [STAND-OFF]  61.21,9.4 0 top
JP24  STAND-OFF  [STAND-OFF]  81.53,9.4 0 top
JP25  STAND-OFF  [STAND-OFF]  87.12,29.72 0 top
JP26  STAND-OFF  [STAND-OFF]  107.44,29.72 0 top
JP27  FIDUCIALUFIDUCIAL  [MICRO-FIDUCIAL]  104.9,11.94 0 top
JP28  FIDUCIALUFIDUCIAL  [MICRO-FIDUCIAL]  90.93,30.99 0 top
JP29  FIDUCIALUFIDUCIAL  [MICRO-FIDUCIAL]  90.93,30.99 0 bottom
JP30  FIDUCIALUFIDUCIAL  [MICRO-FIDUCIAL]  104.9,11.94 0 bottom
JP31  STAND-OFF  [STAND-OFF]  87.12,9.4 0 top
JP32  STAND-OFF  [STAND-OFF]  107.44,9.4 0 top
JP33  STAND-OFF  [STAND-OFF]  113.03,29.72 0 top
JP34  STAND-OFF  [STAND-OFF]  133.35,29.72 0 top
JP35  FIDUCIALUFIDUCIAL  [MICRO-FIDUCIAL]  130.81,11.94 0 top
JP36  FIDUCIALUFIDUCIAL  [MICRO-FIDUCIAL]  116.84,30.99 0 top
JP37  FIDUCIALUFIDUCIAL  [MICRO-FIDUCIAL]  116.84,30.99 0 bottom
JP38  FIDUCIALUFIDUCIAL  [MICRO-FIDUCIAL]  130.81,11.94 0 bottom
JP39  STAND-OFF  [STAND-OFF]  113.03,9.4 0 top
JP40  STAND-OFF  [STAND-OFF]  133.35,9.4 0 top
JP41  STAND-OFF  [STAND-OFF]  138.94,29.72 0 top
JP42  STAND-OFF  [STAND-OFF]  159.26,29.72 0 top
JP43  FIDUCIALUFIDUCIAL  [MICRO-FIDUCIAL]  156.72,11.94 0 top
JP44  FIDUCIALUFIDUCIAL  [MICRO-FIDUCIAL]  142.75,30.99 0 top
JP45  FIDUCIALUFIDUCIAL  [MICRO-FIDUCIAL]  142.75,30.99 0 bottom
JP46  FIDUCIALUFIDUCIAL  [MICRO-FIDUCIAL]  156.72,11.94 0 bottom
JP47  STAND-OFF  [STAND-OFF]  138.94,9.4 0 top
JP48  STAND-OFF  [STAND-OFF]  159.26,9.4 0 top
JP49  STAND-OFF  [STAND-OFF]  164.85,29.72 0 top
JP50  STAND-OFF  [STAND-OFF]  185.17,29.72 0 top
JP51  FIDUCIALUFIDUCIAL  [MICRO-FIDUCIAL]  182.63,11.94 0 top
JP52  FIDUCIALUFIDUCIAL  [MICRO-FIDUCIAL]  168.66,30.99 0 top
JP53  FIDUCIALUFIDUCIAL  [MICRO-FIDUCIAL]  168.66,30.99 0 bottom
JP54  FIDUCIALUFIDUCIAL  [MICRO-FIDUCIAL]  182.63,11.94 0 bottom
JP55  STAND-OFF  [STAND-OFF]  164.85,9.4 0 top
JP56  STAND-OFF  [STAND-OFF]  185.17,9.4 0 top
JP57  STAND-OFF  [STAND-OFF]  9.4,55.63 0 top
JP58  STAND-OFF  [STAND-OFF]  29.72,55.63 0 top
JP59  FIDUCIALUFIDUCIAL  [MICRO-FIDUCIAL]  27.18,37.85 0 top
JP60  FIDUCIALUFIDUCIAL  [MICRO-FIDUCIAL]  13.21,56.9 0 top
JP61  FIDUCIALUFIDUCIAL  [MICRO-FIDUCIAL]  13.21,56.9 0 bottom
JP62  FIDUCIALUFIDUCIAL  [MICRO-FIDUCIAL]  27.18,37.85 0 bottom
JP63  STAND-OFF  [STAND-OFF]  9.4,35.31 0 top
JP64  STAND-OFF  [STAND-OFF]  29.72,35.31 0 top
JP65  STAND-OFF  [STAND-OFF]  35.31,55.63 0 top
JP66  STAND-OFF  [STAND-OFF]  55.63,55.63 0 top
JP67  FIDUCIALUFIDUCIAL  [MICRO-FIDUCIAL]  53.09,37.85 0 top
JP68  FIDUCIALUFIDUCIAL  [MICRO-FIDUCIAL]  39.12,56.9 0 top
JP69  FIDUCIALUFIDUCIAL  [MICRO-FIDUCIAL]  39.12,56.9 0 bottom
JP70  FIDUCIALUFIDUCIAL  [MICRO-FIDUCIAL]  53.09,37.85 0 bottom
JP71  STAND-OFF  [STAND-OFF]  35.31,35.31 0 top
JP72  STAND-OFF  [STAND-OFF]  55.63,35.31 0 top
JP73  STAND-OFF  [STAND-OFF]  61.21,55.63 0 top
JP74  STAND-OFF  [STAND-OFF]  81.53,55.63 0 top
JP75  FIDUCIALUFIDUCIAL  [MICRO-FIDUCIAL]  78.99,37.85 0 top
JP76  FIDUCIALUFIDUCIAL  [MICRO-FIDUCIAL]  65.02,56.9 0 top
JP77  FIDUCIALUFIDUCIAL  [MICRO-FIDUCIAL]  65.02,56.9 0 bottom
JP78  FIDUCIALUFIDUCIAL  [MICRO-FIDUCIAL]  78.99,37.85 0 bottom
JP79  STAND-OFF  [STAND-OFF]  61.21,35.31 0 top
JP80  STAND-OFF  [STAND-OFF]  81.53,35.31 0 top
JP81  STAND-OFF  [STAND-OFF]  87.12,55.63 0 top
JP82  STAND-OFF  [STAND-OFF]  107.44,55.63 0 top
JP83  FIDUCIALUFIDUCIAL  [MICRO-FIDUCIAL]  104.9,37.85 0 top
JP84  FIDUCIALUFIDUCIAL  [MICRO-FIDUCIAL]  90.93,56.9 0 top
JP85  FIDUCIALUFIDUCIAL  [MICRO-FIDUCIAL]  90.93,56.9 0 bottom
JP86  FIDUCIALUFIDUCIAL  [MICRO-FIDUCIAL]  104.9,37.85 0 bottom
JP87  STAND-OFF  [STAND-OFF]  87.12,35.31 0 top
JP88  STAND-OFF  [STAND-OFF]  107.44,35.31 0 top
JP89  STAND-OFF  [STAND-OFF]  113.03,55.63 0 top
JP90  STAND-OFF  [STAND-OFF]  133.35,55.63 0 top
JP91  FIDUCIALUFIDUCIAL  [MICRO-FIDUCIAL]  130.81,37.85 0 top
JP92  FIDUCIALUFIDUCIAL  [MICRO-FIDUCIAL]  116.84,56.9 0 top
JP93  FIDUCIALUFIDUCIAL  [MICRO-FIDUCIAL]  116.84,56.9 0 bottom
JP94  FIDUCIALUFIDUCIAL  [MICRO-FIDUCIAL]  130.81,37.85 0 bottom
JP95  STAND-OFF  [STAND-OFF]  113.03,35.31 0 top
JP96  STAND-OFF  [STAND-OFF]  133.35,35.31 0 top
JP97  STAND-OFF  [STAND-OFF]  138.94,55.63 0 top
JP98  STAND-OFF  [STAND-OFF]  159.26,55.63 0 top
JP99  FIDUCIALUFIDUCIAL  [MICRO-FIDUCIAL]  156.72,37.85 0 top
JP100  FIDUCIALUFIDUCIAL  [MICRO-FIDUCIAL]  142.75,56.9 0 top
JP101  FIDUCIALUFIDUCIAL  [MICRO-FIDUCIAL]  142.75,56.9 0 bottom
JP102  FIDUCIALUFIDUCIAL  [MICRO-FIDUCIAL]  156.72,37.85 0 bottom
JP103  STAND-OFF  [STAND-OFF]  138.94,35.31 0 top
JP104  STAND-OFF  [STAND-OFF]  159.26,35.31 0 top
JP105  STAND-OFF  [STAND-OFF]  164.85,55.63 0 top
JP106  STAND-OFF  [STAND-OFF]  185.17,55.63 0 top
JP107  FIDUCIALUFIDUCIAL  [MICRO-FIDUCIAL]  182.63,37.85 0 top
JP108  FIDUCIALUFIDUCIAL  [MICRO-FIDUCIAL]  168.66,56.9 0 top
JP109  FIDUCIALUFIDUCIAL  [MICRO-FIDUCIAL]  168.66,56.9 0 bottom
JP110  FIDUCIALUFIDUCIAL  [MICRO-FIDUCIAL]  182.63,37.85 0 bottom
JP111  STAND-OFF  [STAND-OFF]  164.85,35.31 0 top
JP112  STAND-OFF  [STAND-OFF]  185.17,35.31 0 top
JP113  STAND-OFF  [STAND-OFF]  9.4,81.53 0 top
JP114  STAND-OFF  [STAND-OFF]  29.72,81.53 0 top
JP115  FIDUCIALUFIDUCIAL  [MICRO-FIDUCIAL]  27.18,63.75 0 top
JP116  FIDUCIALUFIDUCIAL  [MICRO-FIDUCIAL]  13.21,82.8 0 top
JP117  FIDUCIALUFIDUCIAL  [MICRO-FIDUCIAL]  13.21,82.8 0 bottom
JP118  FIDUCIALUFIDUCIAL  [MICRO-FIDUCIAL]  27.18,63.75 0 bottom
JP119  STAND-OFF  [STAND-OFF]  9.4,61.21 0 top
JP120  STAND-OFF  [STAND-OFF]  29.72,61.21 0 top
JP121  STAND-OFF  [STAND-OFF]  35.31,81.53 0 top
JP122  STAND-OFF  [STAND-OFF]  55.63,81.53 0 top
JP123  FIDUCIALUFIDUCIAL  [MICRO-FIDUCIAL]  53.09,63.75 0 top
JP124  FIDUCIALUFIDUCIAL  [MICRO-FIDUCIAL]  39.12,82.8 0 top
JP125  FIDUCIALUFIDUCIAL  [MICRO-FIDUCIAL]  39.12,82.8 0 bottom
JP126  FIDUCIALUFIDUCIAL  [MICRO-FIDUCIAL]  53.09,63.75 0 bottom
JP127  STAND-OFF  [STAND-OFF]  35.31,61.21 0 top
JP128  STAND-OFF  [STAND-OFF]  55.63,61.21 0 top
JP129  STAND-OFF  [STAND-OFF]  61.21,81.53 0 top
JP130  STAND-OFF  [STAND-OFF]  81.53,81.53 0 top
JP131  FIDUCIALUFIDUCIAL  [MICRO-FIDUCIAL]  78.99,63.75 0 top
JP132  FIDUCIALUFIDUCIAL  [MICRO-FIDUCIAL]  65.02,82.8 0 top
JP133  FIDUCIALUFIDUCIAL  [MICRO-FIDUCIAL]  65.02,82.8 0 bottom
JP134  FIDUCIALUFIDUCIAL  [MICRO-FIDUCIAL]  78.99,63.75 0 bottom
JP135  STAND-OFF  [STAND-OFF]  61.21,61.21 0 top
JP136  STAND-OFF  [STAND-OFF]  81.53,61.21 0 top
JP137  STAND-OFF  [STAND-OFF]  87.12,81.53 0 top
JP138  STAND-OFF  [STAND-OFF]  107.44,81.53 0 top
JP139  FIDUCIALUFIDUCIAL  [MICRO-FIDUCIAL]  104.9,63.75 0 top
JP140  FIDUCIALUFIDUCIAL  [MICRO-FIDUCIAL]  90.93,82.8 0 top
JP141  FIDUCIALUFIDUCIAL  [MICRO-FIDUCIAL]  90.93,82.8 0 bottom
JP142  FIDUCIALUFIDUCIAL  [MICRO-FIDUCIAL]  104.9,63.75 0 bottom
JP143  STAND-OFF  [STAND-OFF]  87.12,61.21 0 top
JP144  STAND-OFF  [STAND-OFF]  107.44,61.21 0 top
JP145  STAND-OFF  [STAND-OFF]  113.03,81.53 0 top
JP146  STAND-OFF  [STAND-OFF]  133.35,81.53 0 top
JP147  FIDUCIALUFIDUCIAL  [MICRO-FIDUCIAL]  130.81,63.75 0 top
JP148  FIDUCIALUFIDUCIAL  [MICRO-FIDUCIAL]  116.84,82.8 0 top
JP149  FIDUCIALUFIDUCIAL  [MICRO-FIDUCIAL]  116.84,82.8 0 bottom
JP150  FIDUCIALUFIDUCIAL  [MICRO-FIDUCIAL]  130.81,63.75 0 bottom
JP151  STAND-OFF  [STAND-OFF]  113.03,61.21 0 top
JP152  STAND-OFF  [STAND-OFF]  133.35,61.21 0 top
JP153  STAND-OFF  [STAND-OFF]  138.94,81.53 0 top
JP154  STAND-OFF  [STAND-OFF]  159.26,81.53 0 top
JP155  FIDUCIALUFIDUCIAL  [MICRO-FIDUCIAL]  156.72,63.75 0 top
JP156  FIDUCIALUFIDUCIAL  [MICRO-FIDUCIAL]  142.75,82.8 0 top
JP157  FIDUCIALUFIDUCIAL  [MICRO-FIDUCIAL]  142.75,82.8 0 bottom
JP158  FIDUCIALUFIDUCIAL  [MICRO-FIDUCIAL]  156.72,63.75 0 bottom
JP159  STAND-OFF  [STAND-OFF]  138.94,61.21 0 top
JP160  STAND-OFF  [STAND-OFF]  159.26,61.21 0 top
JP161  STAND-OFF  [STAND-OFF]  164.85,81.53 0 top
JP162  STAND-OFF  [STAND-OFF]  185.17,81.53 0 top
JP163  FIDUCIALUFIDUCIAL  [MICRO-FIDUCIAL]  182.63,63.75 0 top
JP164  FIDUCIALUFIDUCIAL  [MICRO-FIDUCIAL]  168.66,82.8 0 top
JP165  FIDUCIALUFIDUCIAL  [MICRO-FIDUCIAL]  168.66,82.8 0 bottom
JP166  FIDUCIALUFIDUCIAL  [MICRO-FIDUCIAL]  182.63,63.75 0 bottom
JP167  STAND-OFF  [STAND-OFF]  164.85,61.21 0 top
JP168  STAND-OFF  [STAND-OFF]  185.17,61.21 0 top
JP169  STAND-OFF  [STAND-OFF]  9.4,107.44 0 top
JP170  STAND-OFF  [STAND-OFF]  29.72,107.44 0 top
JP171  FIDUCIALUFIDUCIAL  [MICRO-FIDUCIAL]  27.18,89.66 0 top
JP172  FIDUCIALUFIDUCIAL  [MICRO-FIDUCIAL]  13.21,108.71 0 top
JP173  FIDUCIALUFIDUCIAL  [MICRO-FIDUCIAL]  13.21,108.71 0 bottom
JP174  FIDUCIALUFIDUCIAL  [MICRO-FIDUCIAL]  27.18,89.66 0 bottom
JP175  STAND-OFF  [STAND-OFF]  9.4,87.12 0 top
JP176  STAND-OFF  [STAND-OFF]  29.72,87.12 0 top
JP177  STAND-OFF  [STAND-OFF]  35.31,107.44 0 top
JP178  STAND-OFF  [STAND-OFF]  55.63,107.44 0 top
JP179  FIDUCIALUFIDUCIAL  [MICRO-FIDUCIAL]  53.09,89.66 0 top
JP180  FIDUCIALUFIDUCIAL  [MICRO-FIDUCIAL]  39.12,108.71 0 top
JP181  FIDUCIALUFIDUCIAL  [MICRO-FIDUCIAL]  39.12,108.71 0 bottom
JP182  FIDUCIALUFIDUCIAL  [MICRO-FIDUCIAL]  53.09,89.66 0 bottom
JP183  STAND-OFF  [STAND-OFF]  35.31,87.12 0 top
JP184  STAND-OFF  [STAND-OFF]  55.63,87.12 0 top
JP185  STAND-OFF  [STAND-OFF]  61.21,107.44 0 top
JP186  STAND-OFF  [STAND-OFF]  81.53,107.44 0 top
JP187  FIDUCIALUFIDUCIAL  [MICRO-FIDUCIAL]  78.99,89.66 0 top
JP188  FIDUCIALUFIDUCIAL  [MICRO-FIDUCIAL]  65.02,108.71 0 top
JP189  FIDUCIALUFIDUCIAL  [MICRO-FIDUCIAL]  65.02,108.71 0 bottom
JP190  FIDUCIALUFIDUCIAL  [MICRO-FIDUCIAL]  78.99,89.66 0 bottom
JP191  STAND-OFF  [STAND-OFF]  61.21,87.12 0 top
JP192  STAND-OFF  [STAND-OFF]  81.53,87.12 0 top
JP193  STAND-OFF  [STAND-OFF]  87.12,107.44 0 top
JP194  STAND-OFF  [STAND-OFF]  107.44,107.44 0 top
JP195  FIDUCIALUFIDUCIAL  [MICRO-FIDUCIAL]  104.9,89.66 0 top
JP196  FIDUCIALUFIDUCIAL  [MICRO-FIDUCIAL]  90.93,108.71 0 top
JP197  FIDUCIALUFIDUCIAL  [MICRO-FIDUCIAL]  90.93,108.71 0 bottom
JP198  FIDUCIALUFIDUCIAL  [MICRO-FIDUCIAL]  104.9,89.66 0 bottom
JP199  STAND-OFF  [STAND-OFF]  87.12,87.12 0 top
JP200  STAND-OFF  [STAND-OFF]  107.44,87.12 0 top
JP201  STAND-OFF  [STAND-OFF]  113.03,107.44 0 top
JP202  STAND-OFF  [STAND-OFF]  133.35,107.44 0 top
JP203  FIDUCIALUFIDUCIAL  [MICRO-FIDUCIAL]  130.81,89.66 0 top
JP204  FIDUCIALUFIDUCIAL  [MICRO-FIDUCIAL]  116.84,108.71 0 top
JP205  FIDUCIALUFIDUCIAL  [MICRO-FIDUCIAL]  116.84,108.71 0 bottom
JP206  FIDUCIALUFIDUCIAL  [MICRO-FIDUCIAL]  130.81,89.66 0 bottom
JP207  STAND-OFF  [STAND-OFF]  113.03,87.12 0 top
JP208  STAND-OFF  [STAND-OFF]  133.35,87.12 0 top
JP209  STAND-OFF  [STAND-OFF]  138.94,107.44 0 top
JP210  STAND-OFF  [STAND-OFF]  159.26,107.44 0 top
JP211  FIDUCIALUFIDUCIAL  [MICRO-FIDUCIAL]  156.72,89.66 0 top
JP212  FIDUCIALUFIDUCIAL  [MICRO-FIDUCIAL]  142.75,108.71 0 top
JP213  FIDUCIALUFIDUCIAL  [MICRO-FIDUCIAL]  142.75,108.71 0 bottom
JP214  FIDUCIALUFIDUCIAL  [MICRO-FIDUCIAL]  156.72,89.66 0 bottom
JP215  STAND-OFF  [STAND-OFF]  138.94,87.12 0 top
JP216  STAND-OFF  [STAND-OFF]  159.26,87.12 0 top
JP217  STAND-OFF  [STAND-OFF]  164.85,107.44 0 top
JP218  STAND-OFF  [STAND-OFF]  185.17,107.44 0 top
JP219  FIDUCIALUFIDUCIAL  [MICRO-FIDUCIAL]  182.63,89.66 0 top
JP220  FIDUCIALUFIDUCIAL  [MICRO-FIDUCIAL]  168.66,108.71 0 top
JP221  FIDUCIALUFIDUCIAL  [MICRO-FIDUCIAL]  168.66,108.71 0 bottom
JP222  FIDUCIALUFIDUCIAL  [MICRO-FIDUCIAL]  182.63,89.66 0 bottom
JP223  STAND-OFF  [STAND-OFF]  164.85,87.12 0 top
JP224  STAND-OFF  [STAND-OFF]  185.17,87.12 0 top
JP225  STAND-OFF  [STAND-OFF]  9.4,133.35 0 top
JP226  STAND-OFF  [STAND-OFF]  29.72,133.35 0 top
JP227  FIDUCIALUFIDUCIAL  [MICRO-FIDUCIAL]  27.18,115.57 0 top
JP228  FIDUCIALUFIDUCIAL  [MICRO-FIDUCIAL]  13.21,134.62 0 top
JP229  FIDUCIALUFIDUCIAL  [MICRO-FIDUCIAL]  13.21,134.62 0 bottom
JP230  FIDUCIALUFIDUCIAL  [MICRO-FIDUCIAL]  27.18,115.57 0 bottom
JP231  STAND-OFF  [STAND-OFF]  9.4,113.03 0 top
JP232  STAND-OFF  [STAND-OFF]  29.72,113.03 0 top
JP233  STAND-OFF  [STAND-OFF]  35.31,133.35 0 top
JP234  STAND-OFF  [STAND-OFF]  55.63,133.35 0 top
JP235  FIDUCIALUFIDUCIAL  [MICRO-FIDUCIAL]  53.09,115.57 0 top
JP236  FIDUCIALUFIDUCIAL  [MICRO-FIDUCIAL]  39.12,134.62 0 top
JP237  FIDUCIALUFIDUCIAL  [MICRO-FIDUCIAL]  39.12,134.62 0 bottom
JP238  FIDUCIALUFIDUCIAL  [MICRO-FIDUCIAL]  53.09,115.57 0 bottom
JP239  STAND-OFF  [STAND-OFF]  35.31,113.03 0 top
JP240  STAND-OFF  [STAND-OFF]  55.63,113.03 0 top
JP241  STAND-OFF  [STAND-OFF]  61.21,133.35 0 top
JP242  STAND-OFF  [STAND-OFF]  81.53,133.35 0 top
JP243  FIDUCIALUFIDUCIAL  [MICRO-FIDUCIAL]  78.99,115.57 0 top
JP244  FIDUCIALUFIDUCIAL  [MICRO-FIDUCIAL]  65.02,134.62 0 top
JP245  FIDUCIALUFIDUCIAL  [MICRO-FIDUCIAL]  65.02,134.62 0 bottom
JP246  FIDUCIALUFIDUCIAL  [MICRO-FIDUCIAL]  78.99,115.57 0 bottom
JP247  STAND-OFF  [STAND-OFF]  61.21,113.03 0 top
JP248  STAND-OFF  [STAND-OFF]  81.53,113.03 0 top
JP249  STAND-OFF  [STAND-OFF]  87.12,133.35 0 top
JP250  STAND-OFF  [STAND-OFF]  107.44,133.35 0 top
JP251  FIDUCIALUFIDUCIAL  [MICRO-FIDUCIAL]  104.9,115.57 0 top
JP252  FIDUCIALUFIDUCIAL  [MICRO-FIDUCIAL]  90.93,134.62 0 top
JP253  FIDUCIALUFIDUCIAL  [MICRO-FIDUCIAL]  90.93,134.62 0 bottom
JP254  FIDUCIALUFIDUCIAL  [MICRO-FIDUCIAL]  104.9,115.57 0 bottom
JP255  STAND-OFF  [STAND-OFF]  87.12,113.03 0 top
JP256  STAND-OFF  [STAND-OFF]  107.44,113.03 0 top
JP257  STAND-OFF  [STAND-OFF]  113.03,133.35 0 top
JP258  STAND-OFF  [STAND-OFF]  133.35,133.35 0 top
JP259  FIDUCIALUFIDUCIAL  [MICRO-FIDUCIAL]  130.81,115.57 0 top
JP260  FIDUCIALUFIDUCIAL  [MICRO-FIDUCIAL]  116.84,134.62 0 top
JP261  FIDUCIALUFIDUCIAL  [MICRO-FIDUCIAL]  116.84,134.62 0 bottom
JP262  FIDUCIALUFIDUCIAL  [MICRO-FIDUCIAL]  130.81,115.57 0 bottom
JP263  STAND-OFF  [STAND-OFF]  113.03,113.03 0 top
JP264  STAND-OFF  [STAND-OFF]  133.35,113.03 0 top
JP265  STAND-OFF  [STAND-OFF]  138.94,133.35 0 top
JP266  STAND-OFF  [STAND-OFF]  159.26,133.35 0 top
JP267  FIDUCIALUFIDUCIAL  [MICRO-FIDUCIAL]  156.72,115.57 0 top
JP268  FIDUCIALUFIDUCIAL  [MICRO-FIDUCIAL]  142.75,134.62 0 top
JP269  FIDUCIALUFIDUCIAL  [MICRO-FIDUCIAL]  142.75,134.62 0 bottom
JP270  FIDUCIALUFIDUCIAL  [MICRO-FIDUCIAL]  156.72,115.57 0 bottom
JP271  STAND-OFF  [STAND-OFF]  138.94,113.03 0 top
JP272  STAND-OFF  [STAND-OFF]  159.26,113.03 0 top
JP273  STAND-OFF  [STAND-OFF]  164.85,133.35 0 top
JP274  STAND-OFF  [STAND-OFF]  185.17,133.35 0 top
JP275  FIDUCIALUFIDUCIAL  [MICRO-FIDUCIAL]  182.63,115.57 0 top
JP276  FIDUCIALUFIDUCIAL  [MICRO-FIDUCIAL]  168.66,134.62 0 top
JP277  FIDUCIALUFIDUCIAL  [MICRO-FIDUCIAL]  168.66,134.62 0 bottom
JP278  FIDUCIALUFIDUCIAL  [MICRO-FIDUCIAL]  182.63,115.57 0 bottom
JP279  STAND-OFF  [STAND-OFF]  164.85,113.03 0 top
JP280  STAND-OFF  [STAND-OFF]  185.17,113.03 0 top
LOGO1  SFE_LOGO_FLAME.1_INCH  [SFE_LOGO_FLAME_.1]  25.3,28.5 0 top
LOGO2  SFE_LOGO_FLAME.1_INCH  [SFE_LOGO_FLAME_.1]  25.25,28.45 0 bottom
LOGO3  QWIIC_LOGO_4MM  [QWIIC_4MM]  9.4,14.48 0 top
LOGO4  OSHW-LOGOS  [OSHW-LOGO-S]  55.63,19.56 0 bottom
LOGO5  OSHW-LOGOS  [OSHW-LOGO-S]  29.72,19.56 0 bottom
LOGO6  SFE_LOGO_FLAME.1_INCH  [SFE_LOGO_FLAME_.1]  51.21,28.5 0 top
LOGO7  SFE_LOGO_FLAME.1_INCH  [SFE_LOGO_FLAME_.1]  51.16,28.45 0 bottom
LOGO8  QWIIC_LOGO_4MM  [QWIIC_4MM]  35.31,14.48 0 top
LOGO9  OSHW-LOGOS  [OSHW-LOGO-S]  81.53,19.56 0 bottom
LOGO10  SFE_LOGO_FLAME.1_INCH  [SFE_LOGO_FLAME_.1]  77.11,28.5 0 top
LOGO11  SFE_LOGO_FLAME.1_INCH  [SFE_LOGO_FLAME_.1]  77.06,28.45 0 bottom
LOGO12  QWIIC_LOGO_4MM  [QWIIC_4MM]  61.21,14.48 0 top
LOGO13  OSHW-LOGOS  [OSHW-LOGO-S]  107.44,19.56 0 bottom
LOGO14  SFE_LOGO_FLAME.1_INCH  [SFE_LOGO_FLAME_.1]  103.02,28.5 0 top
LOGO15  SFE_LOGO_FLAME.1_INCH  [SFE_LOGO_FLAME_.1]  102.97,28.45 0 bottom
LOGO16  QWIIC_LOGO_4MM  [QWIIC_4MM]  87.12,14.48 0 top
LOGO17  OSHW-LOGOS  [OSHW-LOGO-S]  133.35,19.56 0 bottom
LOGO18  SFE_LOGO_FLAME.1_INCH  [SFE_LOGO_FLAME_.1]  128.93,28.5 0 top
LOGO19  SFE_LOGO_FLAME.1_INCH  [SFE_LOGO_FLAME_.1]  128.88,28.45 0 bottom
LOGO20  QWIIC_LOGO_4MM  [QWIIC_4MM]  113.03,14.48 0 top
LOGO21  OSHW-LOGOS  [OSHW-LOGO-S]  159.26,19.56 0 bottom
LOGO22  SFE_LOGO_FLAME.1_INCH  [SFE_LOGO_FLAME_.1]  154.84,28.5 0 top
LOGO23  SFE_LOGO_FLAME.1_INCH  [SFE_LOGO_FLAME_.1]  154.79,28.45 0 bottom
LOGO24  QWIIC_LOGO_4MM  [QWIIC_4MM]  138.94,14.48 0 top
LOGO25  OSHW-LOGOS  [OSHW-LOGO-S]  185.17,19.56 0 bottom
LOGO26  SFE_LOGO_FLAME.1_INCH  [SFE_LOGO_FLAME_.1]  180.75,28.5 0 top
LOGO27  SFE_LOGO_FLAME.1_INCH  [SFE_LOGO_FLAME_.1]  180.7,28.45 0 bottom
LOGO28  QWIIC_LOGO_4MM  [QWIIC_4MM]  164.85,14.48 0 top
LOGO29  OSHW-LOGOS  [OSHW-LOGO-S]  29.72,45.47 0 bottom
LOGO30  SFE_LOGO_FLAME.1_INCH  [SFE_LOGO_FLAME_.1]  25.3,54.41 0 top
LOGO31  SFE_LOGO_FLAME.1_INCH  [SFE_LOGO_FLAME_.1]  25.25,54.36 0 bottom
LOGO32  QWIIC_LOGO_4MM  [QWIIC_4MM]  9.4,40.39 0 top
LOGO33  OSHW-LOGOS  [OSHW-LOGO-S]  55.63,45.47 0 bottom
LOGO34  SFE_LOGO_FLAME.1_INCH  [SFE_LOGO_FLAME_.1]  51.21,54.41 0 top
LOGO35  SFE_LOGO_FLAME.1_INCH  [SFE_LOGO_FLAME_.1]  51.16,54.36 0 bottom
LOGO36  QWIIC_LOGO_4MM  [QWIIC_4MM]  35.31,40.39 0 top
LOGO37  OSHW-LOGOS  [OSHW-LOGO-S]  81.53,45.47 0 bottom
LOGO38  SFE_LOGO_FLAME.1_INCH  [SFE_LOGO_FLAME_.1]  77.11,54.41 0 top
LOGO39  SFE_LOGO_FLAME.1_INCH  [SFE_LOGO_FLAME_.1]  77.06,54.36 0 bottom
LOGO40  QWIIC_LOGO_4MM  [QWIIC_4MM]  61.21,40.39 0 top
LOGO41  OSHW-LOGOS  [OSHW-LOGO-S]  107.44,45.47 0 bottom
LOGO42  SFE_LOGO_FLAME.1_INCH  [SFE_LOGO_FLAME_.1]  103.02,54.41 0 top
LOGO43  SFE_LOGO_FLAME.1_INCH  [SFE_LOGO_FLAME_.1]  102.97,54.36 0 bottom
LOGO44  QWIIC_LOGO_4MM  [QWIIC_4MM]  87.12,40.39 0 top
LOGO45  OSHW-LOGOS  [OSHW-LOGO-S]  133.35,45.47 0 bottom
LOGO46  SFE_LOGO_FLAME.1_INCH  [SFE_LOGO_FLAME_.1]  128.93,54.41 0 top
LOGO47  SFE_LOGO_FLAME.1_INCH  [SFE_LOGO_FLAME_.1]  128.88,54.36 0 bottom
LOGO48  QWIIC_LOGO_4MM  [QWIIC_4MM]  113.03,40.39 0 top
LOGO49  OSHW-LOGOS  [OSHW-LOGO-S]  159.26,45.47 0 bottom
LOGO50  SFE_LOGO_FLAME.1_INCH  [SFE_LOGO_FLAME_.1]  154.84,54.41 0 top
LOGO51  SFE_LOGO_FLAME.1_INCH  [SFE_LOGO_FLAME_.1]  154.79,54.36 0 bottom
LOGO52  QWIIC_LOGO_4MM  [QWIIC_4MM]  138.94,40.39 0 top
LOGO53  OSHW-LOGOS  [OSHW-LOGO-S]  185.17,45.47 0 bottom
LOGO54  SFE_LOGO_FLAME.1_INCH  [SFE_LOGO_FLAME_.1]  180.75,54.41 0 top
LOGO55  SFE_LOGO_FLAME.1_INCH  [SFE_LOGO_FLAME_.1]  180.7,54.36 0 bottom
LOGO56  QWIIC_LOGO_4MM  [QWIIC_4MM]  164.85,40.39 0 top
LOGO57  OSHW-LOGOS  [OSHW-LOGO-S]  29.72,71.37 0 bottom
LOGO58  SFE_LOGO_FLAME.1_INCH  [SFE_LOGO_FLAME_.1]  25.3,80.31 0 top
LOGO59  SFE_LOGO_FLAME.1_INCH  [SFE_LOGO_FLAME_.1]  25.25,80.26 0 bottom
LOGO60  QWIIC_LOGO_4MM  [QWIIC_4MM]  9.4,66.29 0 top
LOGO61  OSHW-LOGOS  [OSHW-LOGO-S]  55.63,71.37 0 bottom
LOGO62  SFE_LOGO_FLAME.1_INCH  [SFE_LOGO_FLAME_.1]  51.21,80.31 0 top
LOGO63  SFE_LOGO_FLAME.1_INCH  [SFE_LOGO_FLAME_.1]  51.16,80.26 0 bottom
LOGO64  QWIIC_LOGO_4MM  [QWIIC_4MM]  35.31,66.29 0 top
LOGO65  OSHW-LOGOS  [OSHW-LOGO-S]  81.53,71.37 0 bottom
LOGO66  SFE_LOGO_FLAME.1_INCH  [SFE_LOGO_FLAME_.1]  77.11,80.31 0 top
LOGO67  SFE_LOGO_FLAME.1_INCH  [SFE_LOGO_FLAME_.1]  77.06,80.26 0 bottom
LOGO68  QWIIC_LOGO_4MM  [QWIIC_4MM]  61.21,66.29 0 top
LOGO69  OSHW-LOGOS  [OSHW-LOGO-S]  107.44,71.37 0 bottom
LOGO70  SFE_LOGO_FLAME.1_INCH  [SFE_LOGO_FLAME_.1]  103.02,80.31 0 top
LOGO71  SFE_LOGO_FLAME.1_INCH  [SFE_LOGO_FLAME_.1]  102.97,80.26 0 bottom
LOGO72  QWIIC_LOGO_4MM  [QWIIC_4MM]  87.12,66.29 0 top
LOGO73  OSHW-LOGOS  [OSHW-LOGO-S]  133.35,71.37 0 bottom
LOGO74  SFE_LOGO_FLAME.1_INCH  [SFE_LOGO_FLAME_.1]  128.93,80.31 0 top
LOGO75  SFE_LOGO_FLAME.1_INCH  [SFE_LOGO_FLAME_.1]  128.88,80.26 0 bottom
LOGO76  QWIIC_LOGO_4MM  [QWIIC_4MM]  113.03,66.29 0 top
LOGO77  OSHW-LOGOS  [OSHW-LOGO-S]  159.26,71.37 0 bottom
LOGO78  SFE_LOGO_FLAME.1_INCH  [SFE_LOGO_FLAME_.1]  154.84,80.31 0 top
LOGO79  SFE_LOGO_FLAME.1_INCH  [SFE_LOGO_FLAME_.1]  154.79,80.26 0 bottom
LOGO80  QWIIC_LOGO_4MM  [QWIIC_4MM]  138.94,66.29 0 top
LOGO81  OSHW-LOGOS  [OSHW-LOGO-S]  185.17,71.37 0 bottom
LOGO82  SFE_LOGO_FLAME.1_INCH  [SFE_LOGO_FLAME_.1]  180.75,80.31 0 top
LOGO83  SFE_LOGO_FLAME.1_INCH  [SFE_LOGO_FLAME_.1]  180.7,80.26 0 bottom
LOGO84  QWIIC_LOGO_4MM  [QWIIC_4MM]  164.85,66.29 0 top
LOGO85  OSHW-LOGOS  [OSHW-LOGO-S]  29.72,97.28 0 bottom
LOGO86  SFE_LOGO_FLAME.1_INCH  [SFE_LOGO_FLAME_.1]  25.3,106.22 0 top
LOGO87  SFE_LOGO_FLAME.1_INCH  [SFE_LOGO_FLAME_.1]  25.25,106.17 0 bottom
LOGO88  QWIIC_LOGO_4MM  [QWIIC_4MM]  9.4,92.2 0 top
LOGO89  OSHW-LOGOS  [OSHW-LOGO-S]  55.63,97.28 0 bottom
LOGO90  SFE_LOGO_FLAME.1_INCH  [SFE_LOGO_FLAME_.1]  51.21,106.22 0 top
LOGO91  SFE_LOGO_FLAME.1_INCH  [SFE_LOGO_FLAME_.1]  51.16,106.17 0 bottom
LOGO92  QWIIC_LOGO_4MM  [QWIIC_4MM]  35.31,92.2 0 top
LOGO93  OSHW-LOGOS  [OSHW-LOGO-S]  81.53,97.28 0 bottom
LOGO94  SFE_LOGO_FLAME.1_INCH  [SFE_LOGO_FLAME_.1]  77.11,106.22 0 top
LOGO95  SFE_LOGO_FLAME.1_INCH  [SFE_LOGO_FLAME_.1]  77.06,106.17 0 bottom
LOGO96  QWIIC_LOGO_4MM  [QWIIC_4MM]  61.21,92.2 0 top
LOGO97  OSHW-LOGOS  [OSHW-LOGO-S]  107.44,97.28 0 bottom
LOGO98  SFE_LOGO_FLAME.1_INCH  [SFE_LOGO_FLAME_.1]  103.02,106.22 0 top
LOGO99  SFE_LOGO_FLAME.1_INCH  [SFE_LOGO_FLAME_.1]  102.97,106.17 0 bottom
LOGO100  QWIIC_LOGO_4MM  [QWIIC_4MM]  87.12,92.2 0 top
LOGO101  OSHW-LOGOS  [OSHW-LOGO-S]  133.35,97.28 0 bottom
LOGO102  SFE_LOGO_FLAME.1_INCH  [SFE_LOGO_FLAME_.1]  128.93,106.22 0 top
LOGO103  SFE_LOGO_FLAME.1_INCH  [SFE_LOGO_FLAME_.1]  128.88,106.17 0 bottom
LOGO104  QWIIC_LOGO_4MM  [QWIIC_4MM]  113.03,92.2 0 top
LOGO105  OSHW-LOGOS  [OSHW-LOGO-S]  159.26,97.28 0 bottom
LOGO106  SFE_LOGO_FLAME.1_INCH  [SFE_LOGO_FLAME_.1]  154.84,106.22 0 top
LOGO107  SFE_LOGO_FLAME.1_INCH  [SFE_LOGO_FLAME_.1]  154.79,106.17 0 bottom
LOGO108  QWIIC_LOGO_4MM  [QWIIC_4MM]  138.94,92.2 0 top
LOGO109  OSHW-LOGOS  [OSHW-LOGO-S]  185.17,97.28 0 bottom
LOGO110  SFE_LOGO_FLAME.1_INCH  [SFE_LOGO_FLAME_.1]  180.75,106.22 0 top
LOGO111  SFE_LOGO_FLAME.1_INCH  [SFE_LOGO_FLAME_.1]  180.7,106.17 0 bottom
LOGO112  QWIIC_LOGO_4MM  [QWIIC_4MM]  164.85,92.2 0 top
LOGO113  OSHW-LOGOS  [OSHW-LOGO-S]  29.72,123.19 0 bottom
LOGO114  SFE_LOGO_FLAME.1_INCH  [SFE_LOGO_FLAME_.1]  25.3,132.13 0 top
LOGO115  SFE_LOGO_FLAME.1_INCH  [SFE_LOGO_FLAME_.1]  25.25,132.08 0 bottom
LOGO116  QWIIC_LOGO_4MM  [QWIIC_4MM]  9.4,118.11 0 top
LOGO117  OSHW-LOGOS  [OSHW-LOGO-S]  55.63,123.19 0 bottom
LOGO118  SFE_LOGO_FLAME.1_INCH  [SFE_LOGO_FLAME_.1]  51.21,132.13 0 top
LOGO119  SFE_LOGO_FLAME.1_INCH  [SFE_LOGO_FLAME_.1]  51.16,132.08 0 bottom
LOGO120  QWIIC_LOGO_4MM  [QWIIC_4MM]  35.31,118.11 0 top
LOGO121  OSHW-LOGOS  [OSHW-LOGO-S]  81.53,123.19 0 bottom
LOGO122  SFE_LOGO_FLAME.1_INCH  [SFE_LOGO_FLAME_.1]  77.11,132.13 0 top
LOGO123  SFE_LOGO_FLAME.1_INCH  [SFE_LOGO_FLAME_.1]  77.06,132.08 0 bottom
LOGO124  QWIIC_LOGO_4MM  [QWIIC_4MM]  61.21,118.11 0 top
LOGO125  OSHW-LOGOS  [OSHW-LOGO-S]  107.44,123.19 0 bottom
LOGO126  SFE_LOGO_FLAME.1_INCH  [SFE_LOGO_FLAME_.1]  103.02,132.13 0 top
LOGO127  SFE_LOGO_FLAME.1_INCH  [SFE_LOGO_FLAME_.1]  102.97,132.08 0 bottom
LOGO128  QWIIC_LOGO_4MM  [QWIIC_4MM]  87.12,118.11 0 top
LOGO129  OSHW-LOGOS  [OSHW-LOGO-S]  133.35,123.19 0 bottom
LOGO130  SFE_LOGO_FLAME.1_INCH  [SFE_LOGO_FLAME_.1]  128.93,132.13 0 top
LOGO131  SFE_LOGO_FLAME.1_INCH  [SFE_LOGO_FLAME_.1]  128.88,132.08 0 bottom
LOGO132  QWIIC_LOGO_4MM  [QWIIC_4MM]  113.03,118.11 0 top
LOGO133  OSHW-LOGOS  [OSHW-LOGO-S]  159.26,123.19 0 bottom
LOGO134  SFE_LOGO_FLAME.1_INCH  [SFE_LOGO_FLAME_.1]  154.84,132.13 0 top
LOGO135  SFE_LOGO_FLAME.1_INCH  [SFE_LOGO_FLAME_.1]  154.79,132.08 0 bottom
LOGO136  QWIIC_LOGO_4MM  [QWIIC_4MM]  138.94,118.11 0 top
LOGO137  OSHW-LOGOS  [OSHW-LOGO-S]  185.17,123.19 0 bottom
LOGO138  SFE_LOGO_FLAME.1_INCH  [SFE_LOGO_FLAME_.1]  180.75,132.13 0 top
LOGO139  SFE_LOGO_FLAME.1_INCH  [SFE_LOGO_FLAME_.1]  180.7,132.08 0 bottom
LOGO140  QWIIC_LOGO_4MM  [QWIIC_4MM]  164.85,118.11 0 top
PWR  JUMPER-SMT_2_NC_TRACE_SILK  [SMT-JUMPER_2_NC_TRACE_SILK]  13.21,24.89 0 top
PWR1  JUMPER-SMT_2_NC_TRACE_SILK  [SMT-JUMPER_2_NC_TRACE_SILK]  39.12,24.89 0 top
PWR2  JUMPER-SMT_2_NC_TRACE_SILK  [SMT-JUMPER_2_NC_TRACE_SILK]  65.02,24.89 0 top
PWR3  JUMPER-SMT_2_NC_TRACE_SILK  [SMT-JUMPER_2_NC_TRACE_SILK]  90.93,24.89 0 top
PWR4  JUMPER-SMT_2_NC_TRACE_SILK  [SMT-JUMPER_2_NC_TRACE_SILK]  116.84,24.89 0 top
PWR5  JUMPER-SMT_2_NC_TRACE_SILK  [SMT-JUMPER_2_NC_TRACE_SILK]  142.75,24.89 0 top
PWR6  JUMPER-SMT_2_NC_TRACE_SILK  [SMT-JUMPER_2_NC_TRACE_SILK]  168.66,24.89 0 top
PWR7  JUMPER-SMT_2_NC_TRACE_SILK  [SMT-JUMPER_2_NC_TRACE_SILK]  13.21,50.8 0 top
PWR8  JUMPER-SMT_2_NC_TRACE_SILK  [SMT-JUMPER_2_NC_TRACE_SILK]  39.12,50.8 0 top
PWR9  JUMPER-SMT_2_NC_TRACE_SILK  [SMT-JUMPER_2_NC_TRACE_SILK]  65.02,50.8 0 top
PWR10  JUMPER-SMT_2_NC_TRACE_SILK  [SMT-JUMPER_2_NC_TRACE_SILK]  90.93,50.8 0 top
PWR11  JUMPER-SMT_2_NC_TRACE_SILK  [SMT-JUMPER_2_NC_TRACE_SILK]  116.84,50.8 0 top
PWR12  JUMPER-SMT_2_NC_TRACE_SILK  [SMT-JUMPER_2_NC_TRACE_SILK]  142.75,50.8 0 top
PWR13  JUMPER-SMT_2_NC_TRACE_SILK  [SMT-JUMPER_2_NC_TRACE_SILK]  168.66,50.8 0 top
PWR14  JUMPER-SMT_2_NC_TRACE_SILK  [SMT-JUMPER_2_NC_TRACE_SILK]  13.21,76.71 0 top
PWR15  JUMPER-SMT_2_NC_TRACE_SILK  [SMT-JUMPER_2_NC_TRACE_SILK]  39.12,76.71 0 top
PWR16  JUMPER-SMT_2_NC_TRACE_SILK  [SMT-JUMPER_2_NC_TRACE_SILK]  65.02,76.71 0 top
PWR17  JUMPER-SMT_2_NC_TRACE_SILK  [SMT-JUMPER_2_NC_TRACE_SILK]  90.93,76.71 0 top
PWR18  JUMPER-SMT_2_NC_TRACE_SILK  [SMT-JUMPER_2_NC_TRACE_SILK]  116.84,76.71 0 top
PWR19  JUMPER-SMT_2_NC_TRACE_SILK  [SMT-JUMPER_2_NC_TRACE_SILK]  142.75,76.71 0 top
PWR20  JUMPER-SMT_2_NC_TRACE_SILK  [SMT-JUMPER_2_NC_TRACE_SILK]  168.66,76.71 0 top
PWR21  JUMPER-SMT_2_NC_TRACE_SILK  [SMT-JUMPER_2_NC_TRACE_SILK]  13.21,102.62 0 top
PWR22  JUMPER-SMT_2_NC_TRACE_SILK  [SMT-JUMPER_2_NC_TRACE_SILK]  39.12,102.62 0 top
PWR23  JUMPER-SMT_2_NC_TRACE_SILK  [SMT-JUMPER_2_NC_TRACE_SILK]  65.02,102.62 0 top
PWR24  JUMPER-SMT_2_NC_TRACE_SILK  [SMT-JUMPER_2_NC_TRACE_SILK]  90.93,102.62 0 top
PWR25  JUMPER-SMT_2_NC_TRACE_SILK  [SMT-JUMPER_2_NC_TRACE_SILK]  116.84,102.62 0 top
PWR26  JUMPER-SMT_2_NC_TRACE_SILK  [SMT-JUMPER_2_NC_TRACE_SILK]  142.75,102.62 0 top
PWR27  JUMPER-SMT_2_NC_TRACE_SILK  [SMT-JUMPER_2_NC_TRACE_SILK]  168.66,102.62 0 top
PWR28  JUMPER-SMT_2_NC_TRACE_SILK  [SMT-JUMPER_2_NC_TRACE_SILK]  13.21,128.52 0 top
PWR29  JUMPER-SMT_2_NC_TRACE_SILK  [SMT-JUMPER_2_NC_TRACE_SILK]  39.12,128.52 0 top
PWR30  JUMPER-SMT_2_NC_TRACE_SILK  [SMT-JUMPER_2_NC_TRACE_SILK]  65.02,128.52 0 top
PWR31  JUMPER-SMT_2_NC_TRACE_SILK  [SMT-JUMPER_2_NC_TRACE_SILK]  90.93,128.52 0 top
PWR32  JUMPER-SMT_2_NC_TRACE_SILK  [SMT-JUMPER_2_NC_TRACE_SILK]  116.84,128.52 0 top
PWR33  JUMPER-SMT_2_NC_TRACE_SILK  [SMT-JUMPER_2_NC_TRACE_SILK]  142.75,128.52 0 top
PWR34  JUMPER-SMT_2_NC_TRACE_SILK  [SMT-JUMPER_2_NC_TRACE_SILK]  168.66,128.52 0 top
R1  4.7k  [0603]  15.62,25.02 90 top
R2  4.7k  [0603]  15.75,19.56 270 top
R3  1k  [0603]  10.79,24.89 90 top
R4  4.7k  [0603]  19.56,15.11 0 top
R5  1k  [0603]  36.7,24.89 90 top
R6  4.7k  [0603]  41.53,25.02 90 top
R7  4.7k  [0603]  24.64,24.64 90 top
R8  4.7k  [0603]  50.55,24.64 90 top
R9  4.7k  [0603]  41.66,19.56 270 top
R10  4.7k  [0603]  45.47,15.11 0 top
R11  1k  [0603]  62.61,24.89 90 top
R12  4.7k  [0603]  67.44,25.02 90 top
R13  4.7k  [0603]  76.45,24.64 90 top
R14  4.7k  [0603]  67.56,19.56 270 top
R15  4.7k  [0603]  71.37,15.11 0 top
R16  1k  [0603]  88.52,24.89 90 top
R17  4.7k  [0603]  93.34,25.02 90 top
R18  4.7k  [0603]  102.36,24.64 90 top
R19  4.7k  [0603]  93.47,19.56 270 top
R20  4.7k  [0603]  97.28,15.11 0 top
R21  1k  [0603]  114.43,24.89 90 top
R22  4.7k  [0603]  119.25,25.02 90 top
R23  4.7k  [0603]  128.27,24.64 90 top
R24  4.7k  [0603]  119.38,19.56 270 top
R25  4.7k  [0603]  123.19,15.11 0 top
R26  1k  [0603]  140.34,24.89 90 top
R27  4.7k  [0603]  145.16,25.02 90 top
R28  4.7k  [0603]  154.18,24.64 90 top
R29  4.7k  [0603]  145.29,19.56 270 top
R30  4.7k  [0603]  149.1,15.11 0 top
R31  1k  [0603]  166.24,24.89 90 top
R32  4.7k  [0603]  171.07,25.02 90 top
R33  4.7k  [0603]  180.09,24.64 90 top
R34  4.7k  [0603]  171.2,19.56 270 top
R35  4.7k  [0603]  175.01,15.11 0 top
R36  1k  [0603]  10.79,50.8 90 top
R37  4.7k  [0603]  15.62,50.93 90 top
R38  4.7k  [0603]  24.64,50.55 90 top
R39  4.7k  [0603]  15.75,45.47 270 top
R40  4.7k  [0603]  19.56,41.02 0 top
R41  1k  [0603]  36.7,50.8 90 top
R42  4.7k  [0603]  41.53,50.93 90 top
R43  4.7k  [0603]  50.55,50.55 90 top
R44  4.7k  [0603]  41.66,45.47 270 top
R45  4.7k  [0603]  45.47,41.02 0 top
R46  1k  [0603]  62.61,50.8 90 top
R47  4.7k  [0603]  67.44,50.93 90 top
R48  4.7k  [0603]  76.45,50.55 90 top
R49  4.7k  [0603]  67.56,45.47 270 top
R50  4.7k  [0603]  71.37,41.02 0 top
R51  1k  [0603]  88.52,50.8 90 top
R52  4.7k  [0603]  93.34,50.93 90 top
R53  4.7k  [0603]  102.36,50.55 90 top
R54  4.7k  [0603]  93.47,45.47 270 top
R55  4.7k  [0603]  97.28,41.02 0 top
R56  1k  [0603]  114.43,50.8 90 top
R57  4.7k  [0603]  119.25,50.93 90 top
R58  4.7k  [0603]  128.27,50.55 90 top
R59  4.7k  [0603]  119.38,45.47 270 top
R60  4.7k  [0603]  123.19,41.02 0 top
R61  1k  [0603]  140.34,50.8 90 top
R62  4.7k  [0603]  145.16,50.93 90 top
R63  4.7k  [0603]  154.18,50.55 90 top
R64  4.7k  [0603]  145.29,45.47 270 top
R65  4.7k  [0603]  149.1,41.02 0 top
R66  1k  [0603]  166.24,50.8 90 top
R67  4.7k  [0603]  171.07,50.93 90 top
R68  4.7k  [0603]  180.09,50.55 90 top
R69  4.7k  [0603]  171.2,45.47 270 top
R70  4.7k  [0603]  175.01,41.02 0 top
R71  1k  [0603]  10.79,76.71 90 top
R72  4.7k  [0603]  15.62,76.84 90 top
R73  4.7k  [0603]  24.64,76.45 90 top
R74  4.7k  [0603]  15.75,71.37 270 top
R75  4.7k  [0603]  19.56,66.93 0 top
R76  1k  [0603]  36.7,76.71 90 top
R77  4.7k  [0603]  41.53,76.84 90 top
R78  4.7k  [0603]  50.55,76.45 90 top
R79  4.7k  [0603]  41.66,71.37 270 top
R80  4.7k  [0603]  45.47,66.93 0 top
R81  1k  [0603]  62.61,76.71 90 top
R82  4.7k  [0603]  67.44,76.84 90 top
R83  4.7k  [0603]  76.45,76.45 90 top
R84  4.7k  [0603]  67.56,71.37 270 top